# EAGLE board OBCv1_18_2_12 (EAGLE 5.10)
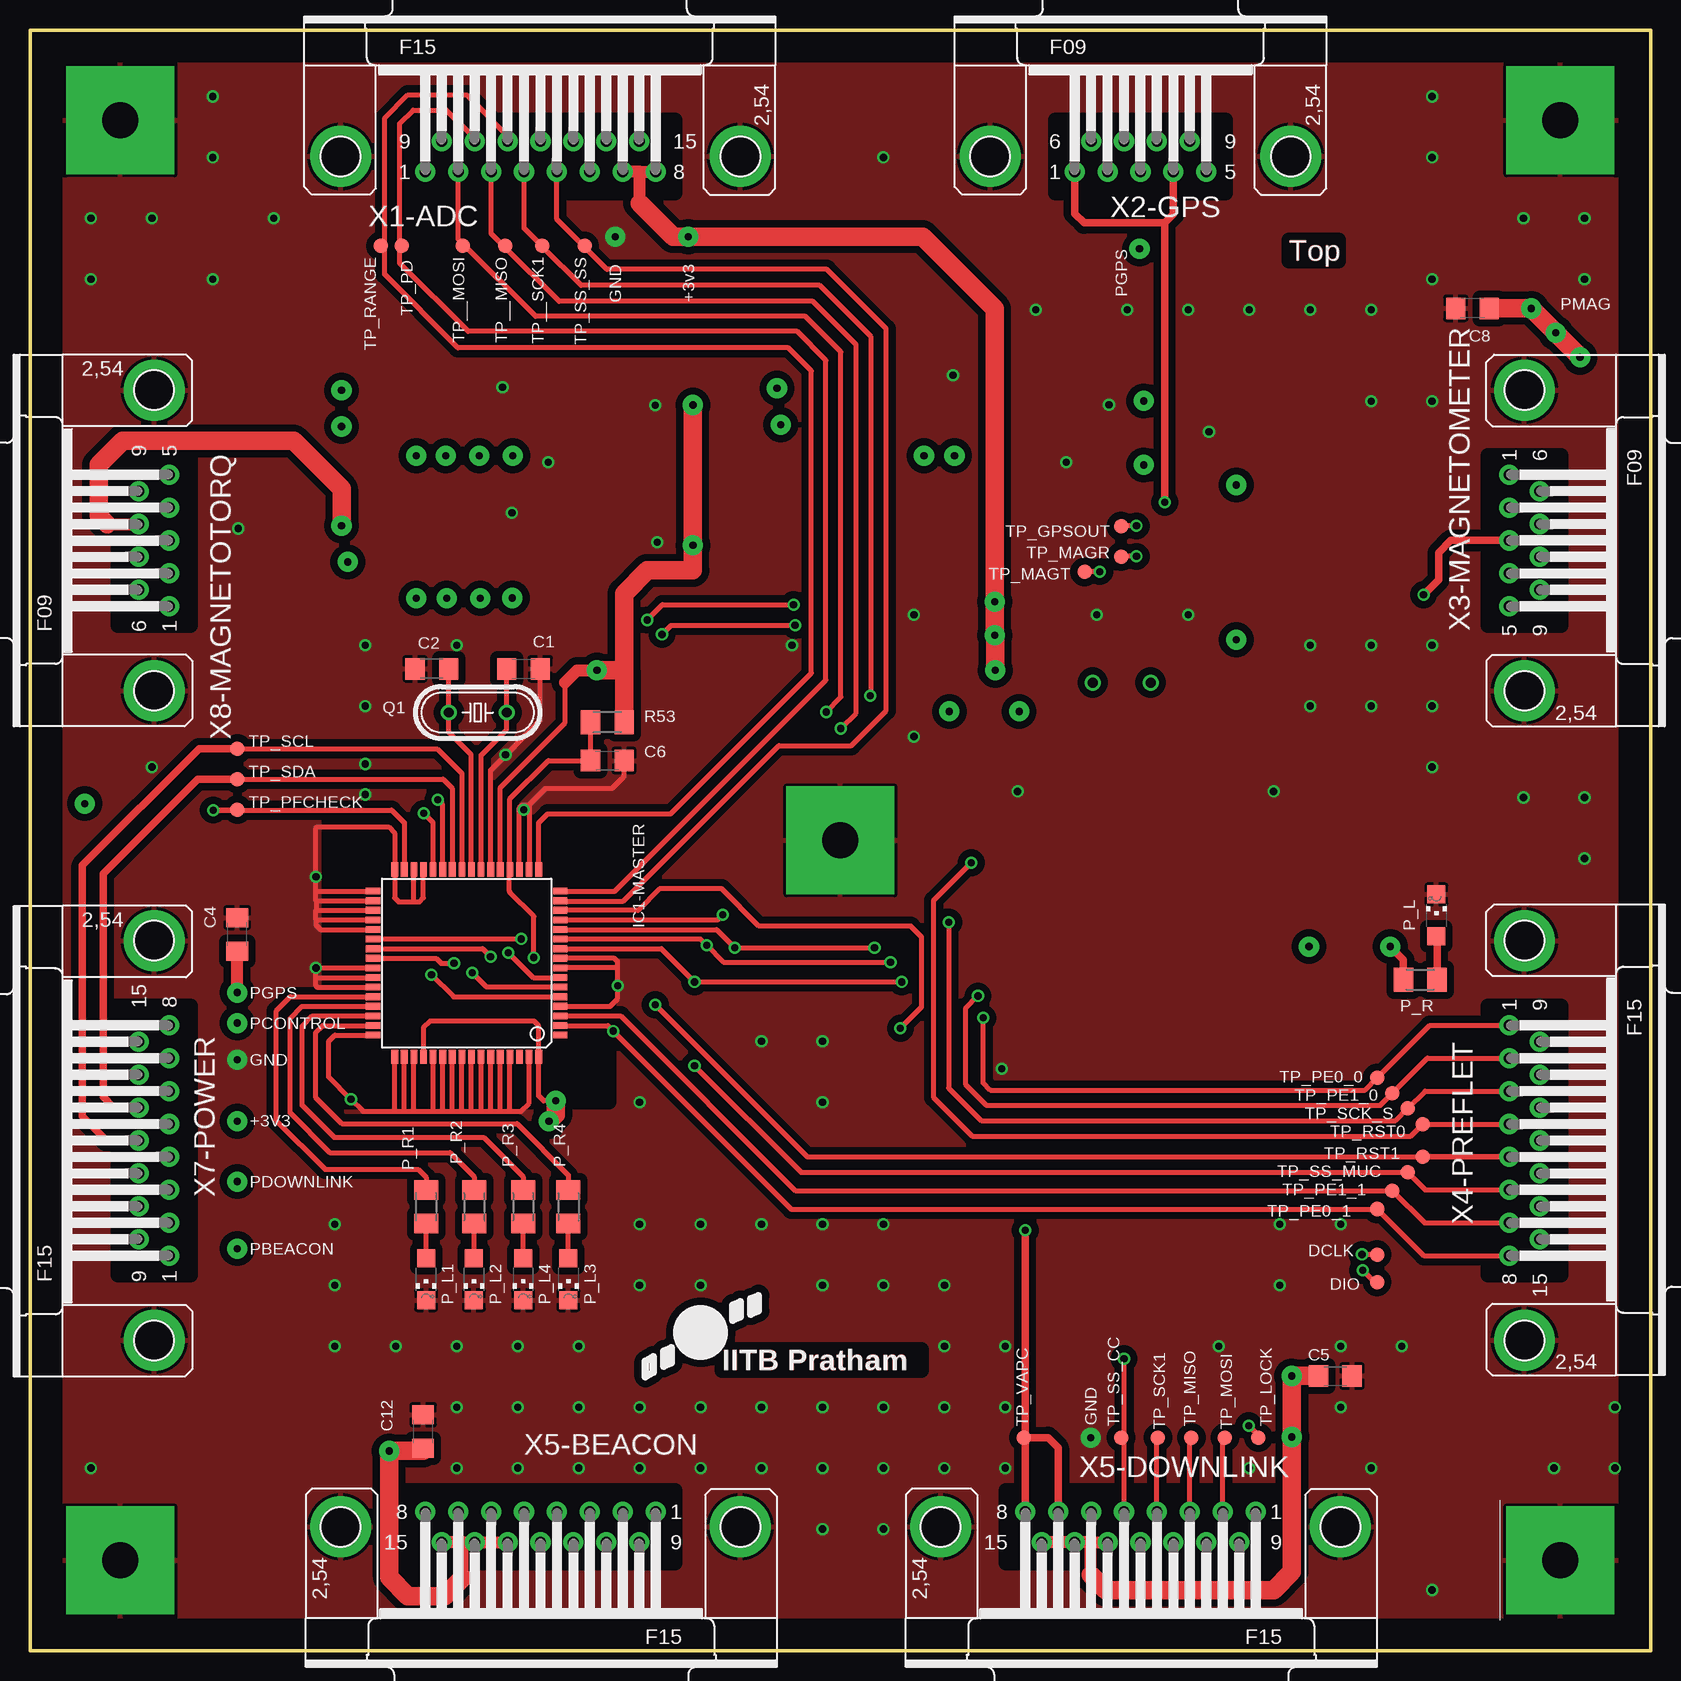
[diagram p0: board, top side]
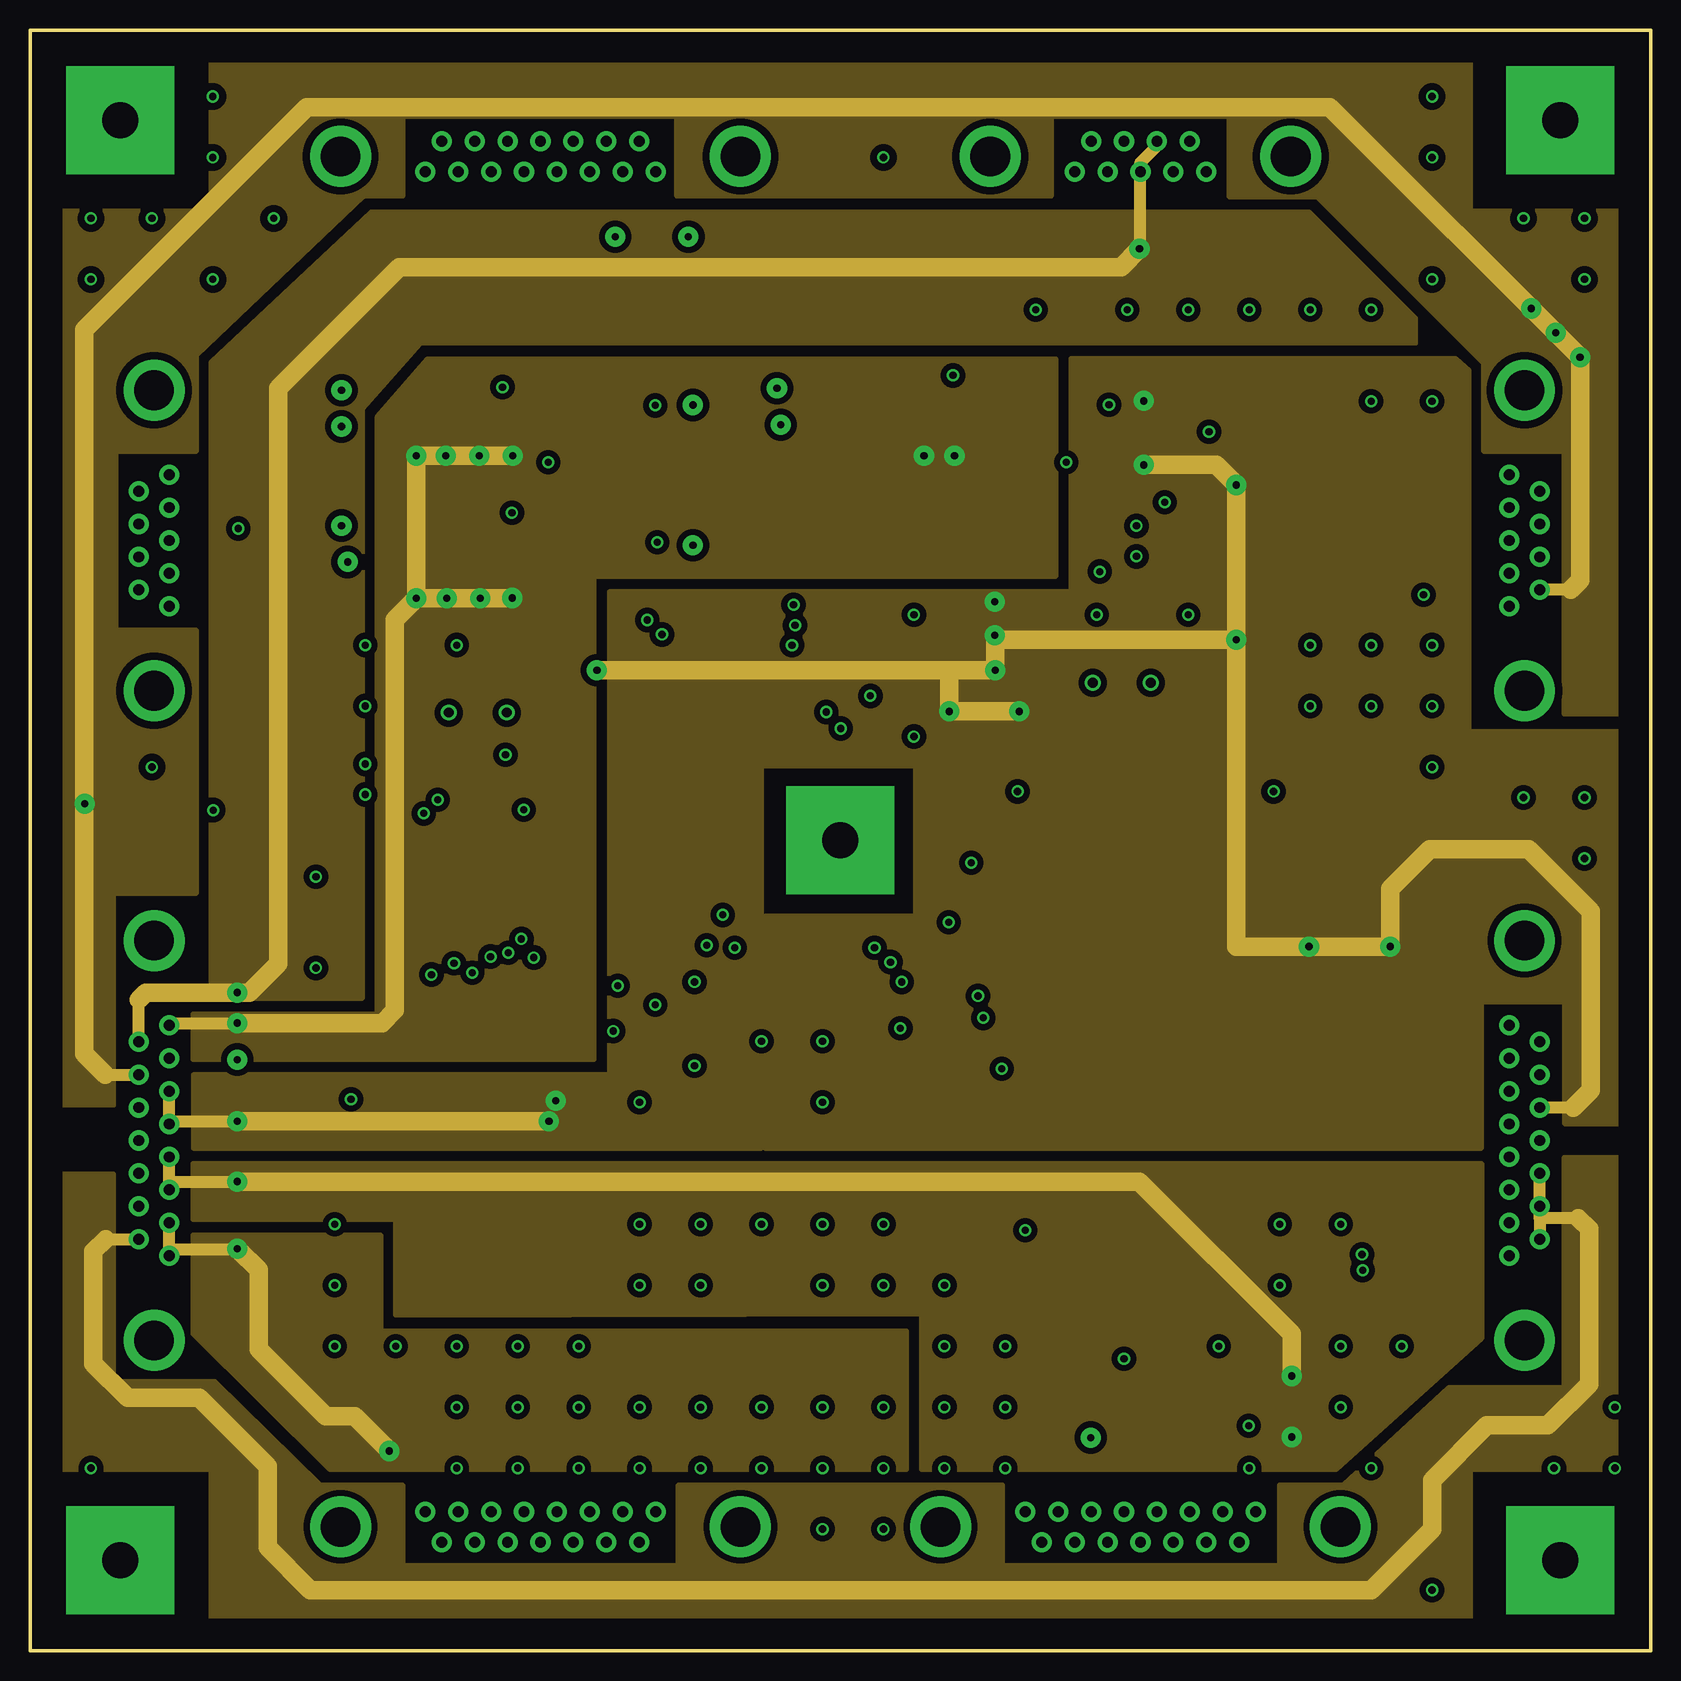
[diagram p1: board, inner layer Power]
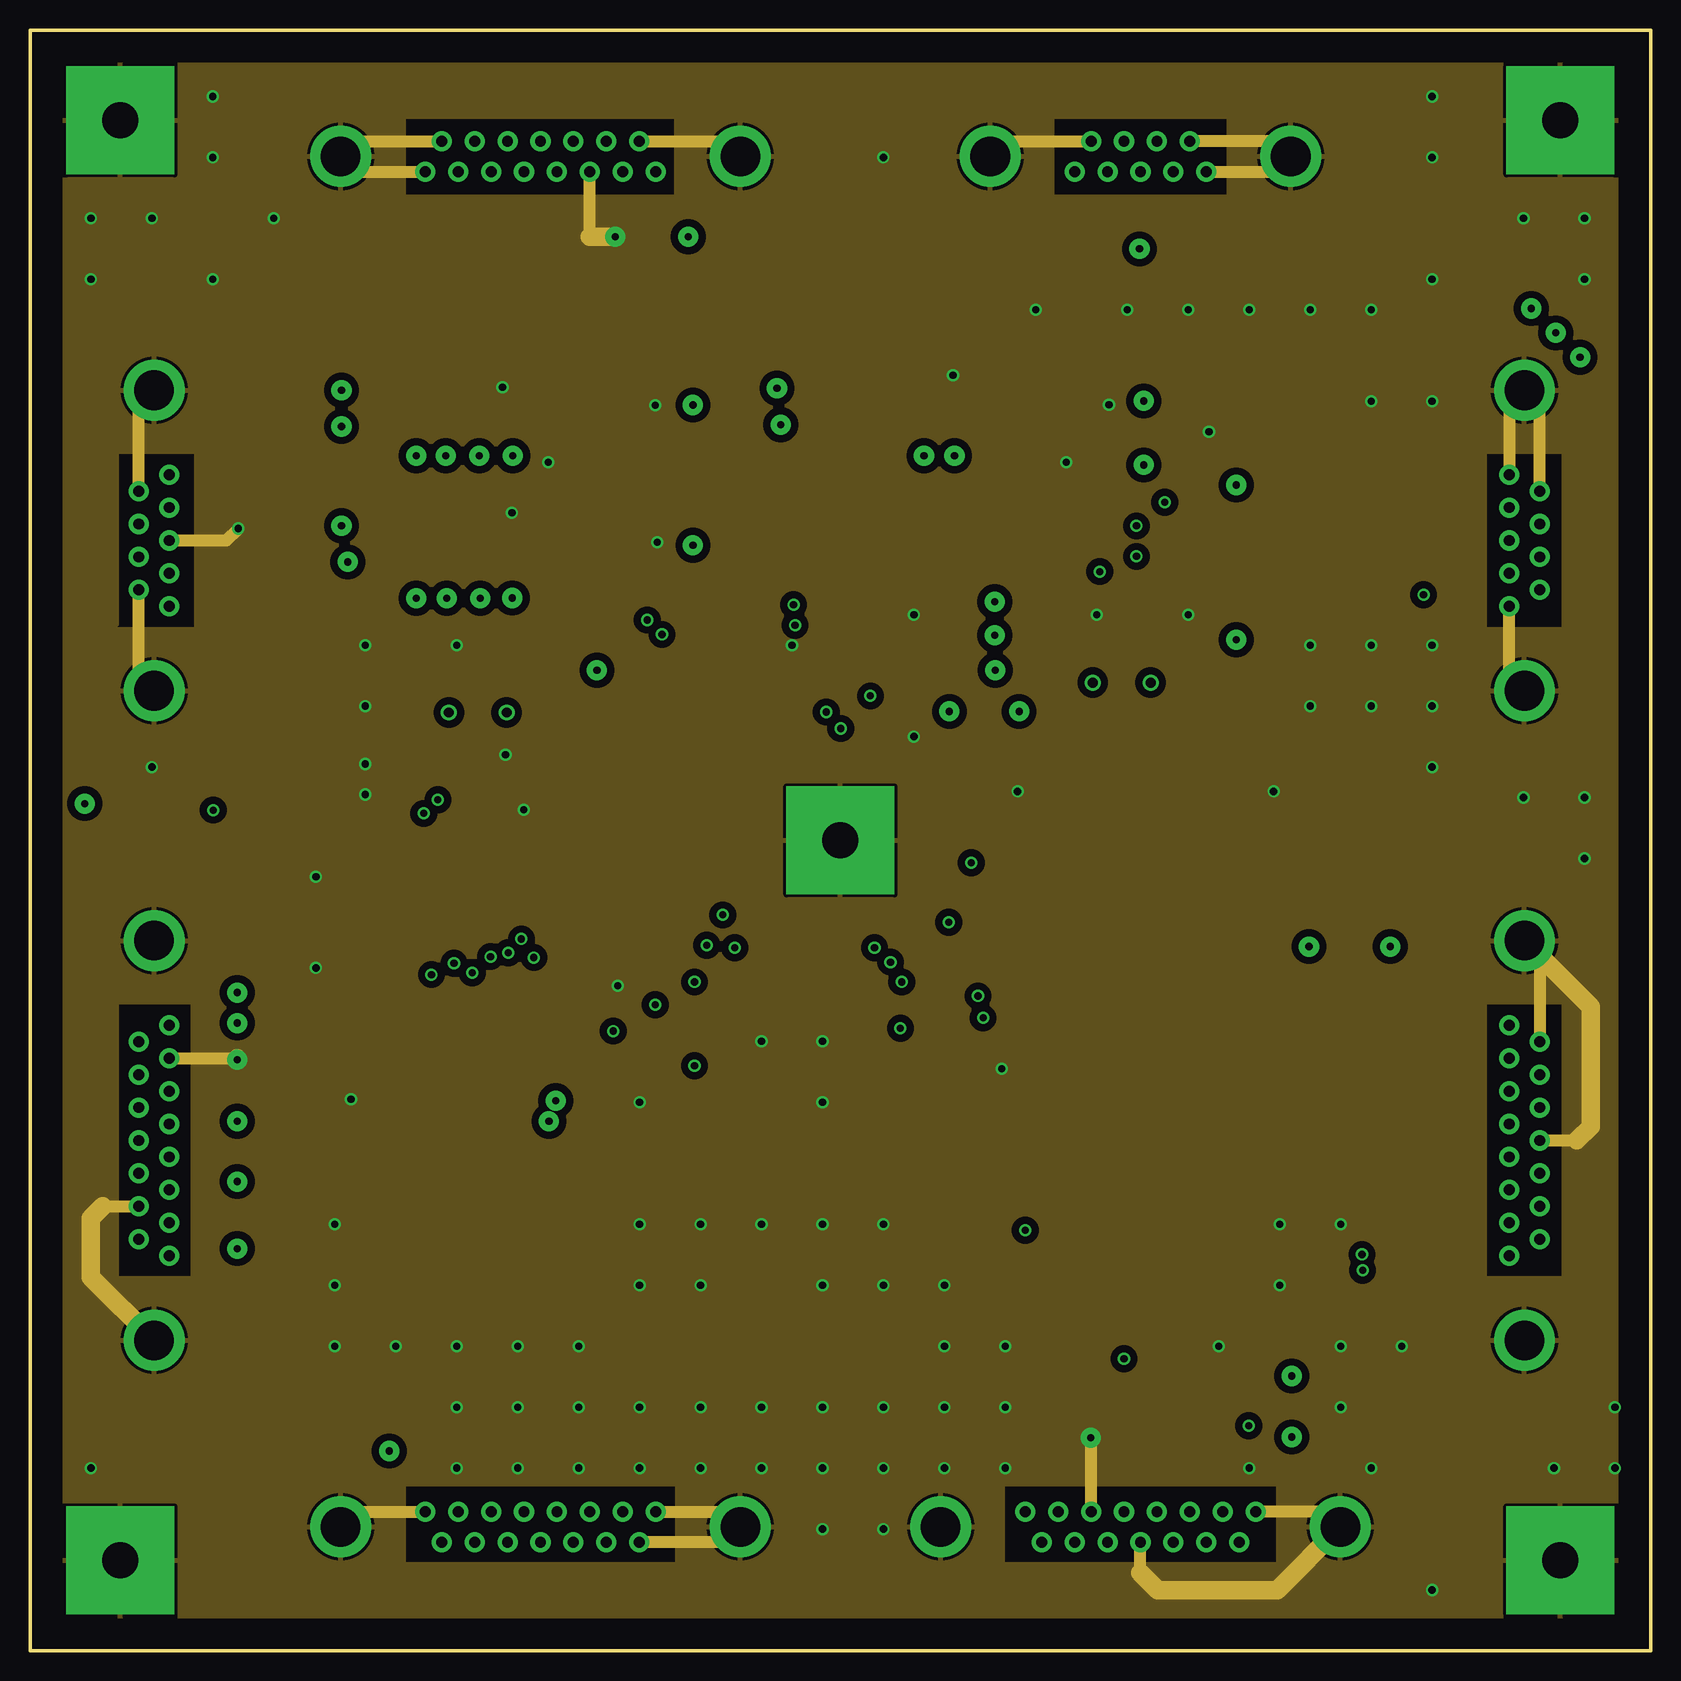
[diagram p2: board, inner layer Gnd]
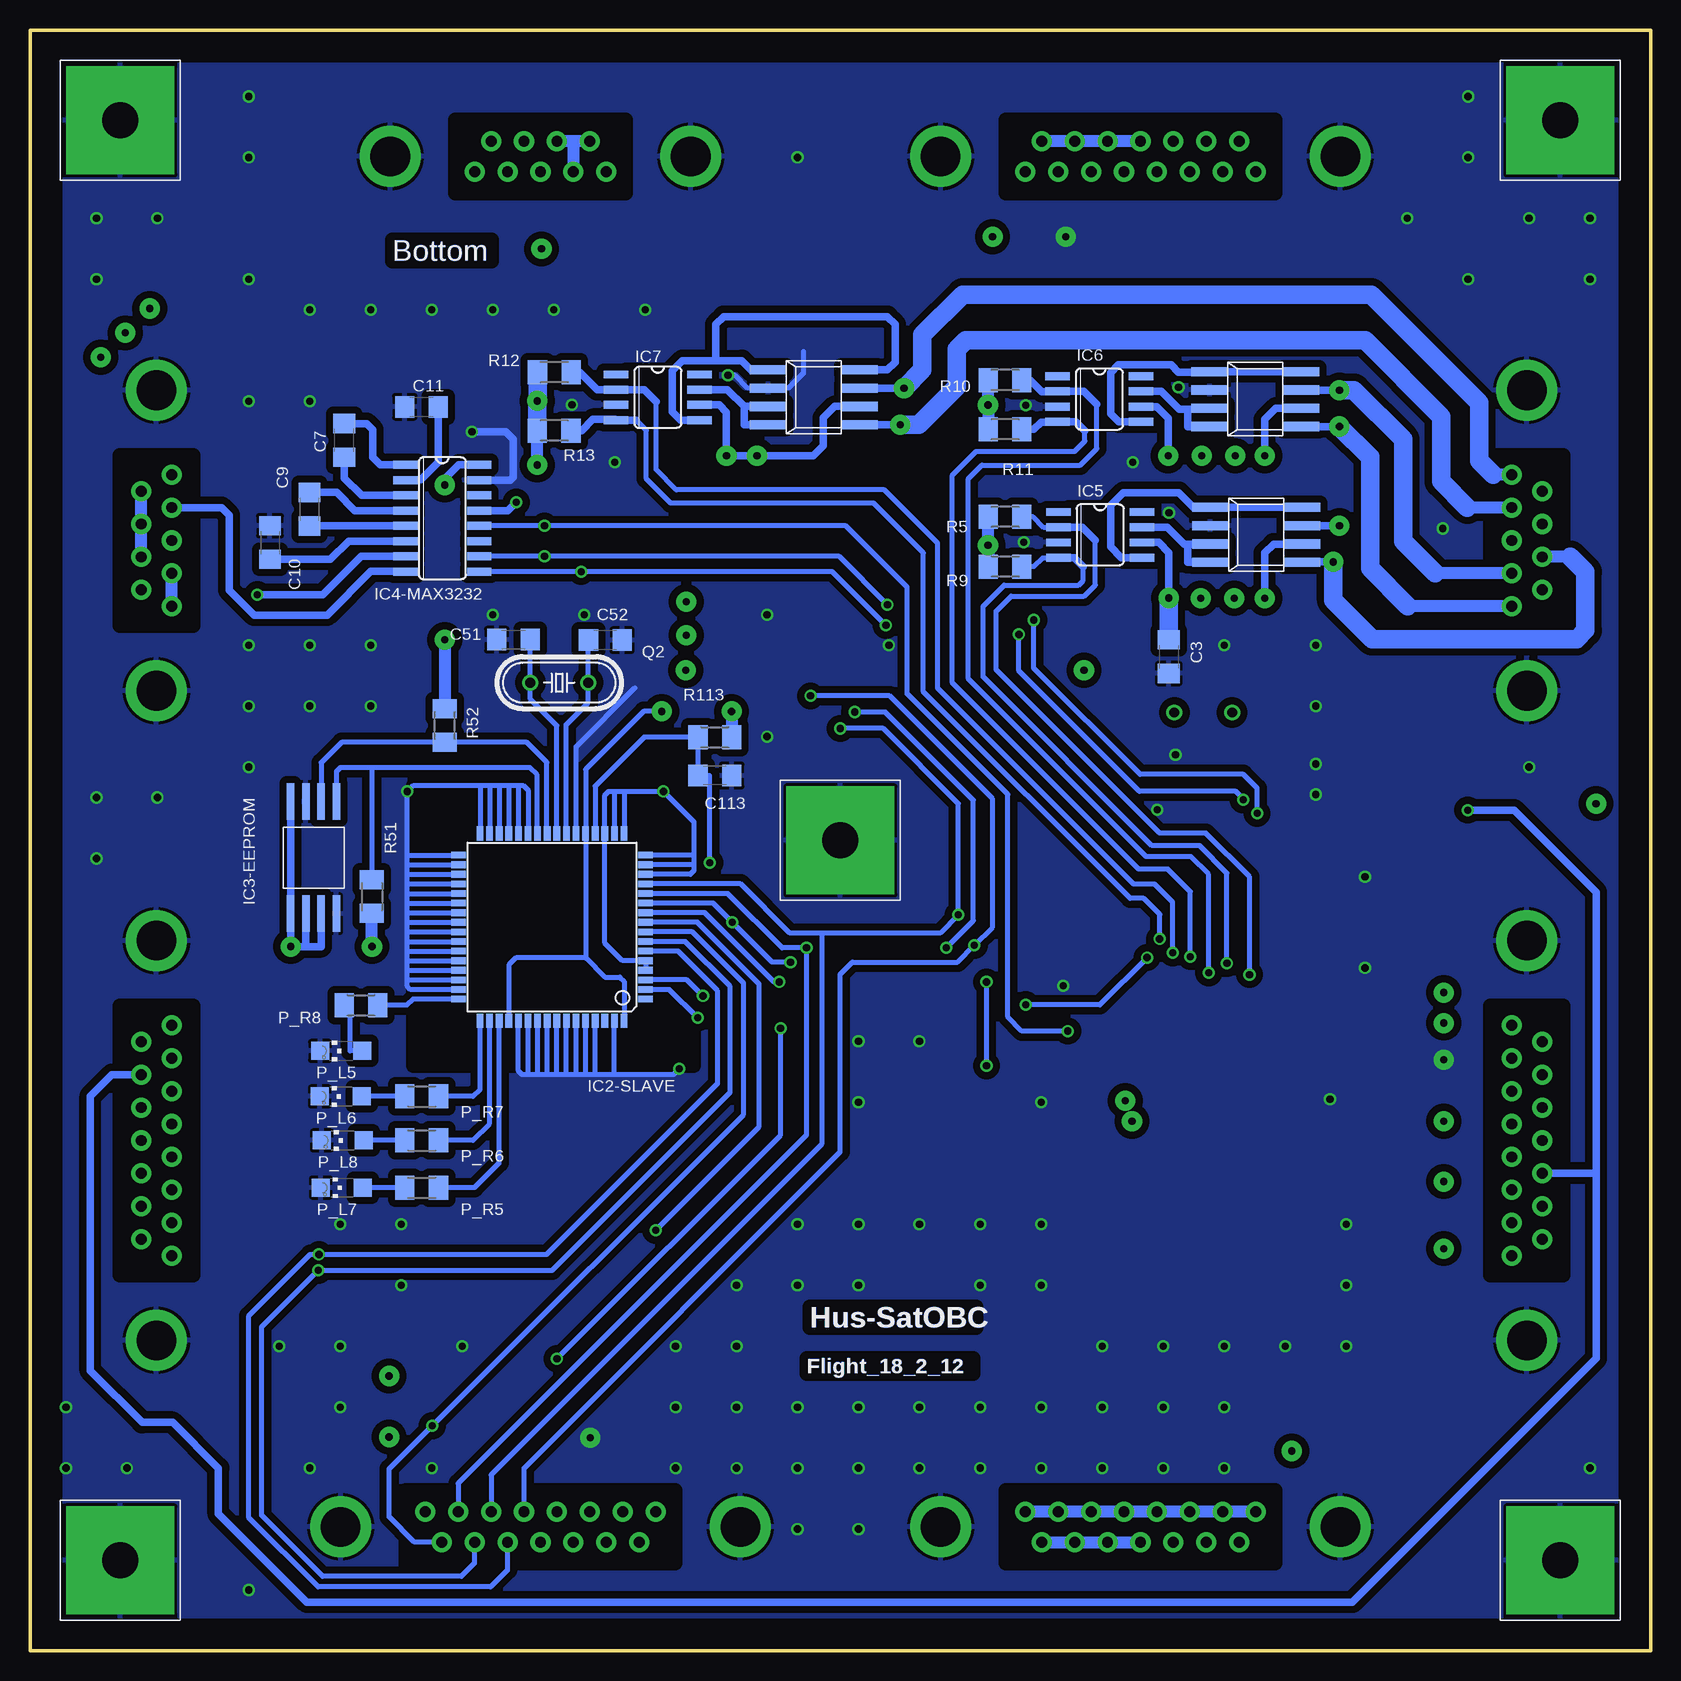
[diagram p3: board, bottom side, seen from below]

Size 135.08 x 135.08 mm. Coordinates in mm from the lower left corner, seen from the top.
Outline: 0,135.08 0,0 135.08,0 135.08,135.08 0,135.08
Copper layers (1*16): Top 0.07mm / dielectric 1.5mm / Bottom 0.07mm
Design rules "satellite": minimum track width 10mil, minimum drill 20mil, track to track 6mil, track to pad 6mil, pad to pad 6mil, via to via 6mil, smd to smd 6mil, copper to edge 100mil, drill to drill 8mil, minimum pad ring 10mil, minimum via ring 8mil, stop-mask expansion 4mil, vias tented up to drill 0mil, thermal gap 10mil
Net classes: 0 Signal: width 0.254 mm, clearance 0.254 mm; 1 Power: width 0.254 mm, clearance 0.508 mm to class 0, clearance 0.508 mm
tRestrict: area 24.9,45.7 to 48.3,69.1
bRestrict: area 79.8,48.8 to 103.1,72.1

## Footprints (pad centres in the part's own frame; a part is rotated, then mirrored left to right if it is on the bottom)
C1206 = smd 1.6 x 1.8: 1 -1.4,0; 2 1.4,0
TP12R = smd 1.2 x 1.2: TP 0,0
TQFP64 = smd 1.194 x 0.559: 1 -7.8,6; 2 -7.8,5.2; 3 -7.8,4.4; 4 -7.8,3.6; 5 -7.8,2.8; 6 -7.8,2; 7 -7.8,1.2; 8 -7.8,0.4; 9 -7.8,-0.4; 10 -7.8,-1.2; 11 -7.8,-2; 12 -7.8,-2.8; 13 -7.8,-3.6; 14 -7.8,-4.4; 15 -7.8,-5.2; 16 -7.8,-6; 33 7.8,-6; 34 7.8,-5.2; 35 7.8,-4.4; 36 7.8,-3.6; 37 7.8,-2.8; 38 7.8,-2; 39 7.8,-1.2; 40 7.8,-0.4; 41 7.8,0.4; 42 7.8,1.2; 43 7.8,2; 44 7.8,2.8; 45 7.8,3.6; 46 7.8,4.4; 47 7.8,5.2; 48 7.8,6 | smd 0.559 x 1.194: 17 -6,-7.8; 18 -5.2,-7.8; 19 -4.4,-7.8; 20 -3.6,-7.8; 21 -2.8,-7.8; 22 -2,-7.8; 23 -1.2,-7.8; 24 -0.4,-7.8; 25 0.4,-7.8; 26 1.2,-7.8; 27 2,-7.8; 28 2.8,-7.8; 29 3.6,-7.8; 30 4.4,-7.8; 31 5.2,-7.8; 32 6,-7.8; 49 6,7.8; 50 5.2,7.8; 51 4.4,7.8; 52 3.6,7.8; 53 2.8,7.8; 54 2,7.8; 55 1.2,7.8; 56 0.4,7.8; 57 -0.4,7.8; 58 -1.2,7.8; 59 -2,7.8; 60 -2.8,7.8; 61 -3.6,7.8; 62 -4.4,7.8; 63 -5.2,7.8; 64 -6,7.8
24FC1025 = smd 0.635 x 3.048: P$1 1.905,4.674; P$2 0.635,4.674; P$3 -0.635,4.674; P$4 -1.905,4.674; P$5 -1.905,-4.674; P$6 -0.635,-4.674; P$7 0.635,-4.674; P$8 1.905,-4.674
SO16 = smd 0.66 x 2.032: 1 -4.445,-3.073; 2 -3.175,-3.073; 3 -1.905,-3.073; 4 -0.635,-3.073; 5 0.635,-3.073; 6 1.905,-3.073; 7 3.175,-3.073; 8 4.445,-3.073; 9 4.445,3.073; 10 3.175,3.073; 11 1.905,3.073; 12 0.635,3.073; 13 -0.635,3.073; 14 -1.905,3.073; 15 -3.175,3.073; 16 -4.445,3.073
SO08 = smd 0.66 x 2.032: 1 -1.905,-3.48; 2 -0.635,-3.48; 3 0.635,-3.48; 4 1.905,-3.48; 5 1.905,3.48; 6 0.635,3.48; 7 -0.635,3.48; 8 -1.905,3.48
SM8 = smd 0.762 x 3.048: 1 2.286,3.81; 2 0.762,3.81; 3 -0.762,3.81; 4 -2.286,3.81; 5 -2.286,-3.81; 6 -0.762,-3.81; 7 0.762,-3.81; 8 2.286,-3.81
CHIPLED_1206 = smd 1.5 x 1.5: A 0,-1.75; C 0,1.75
M1206 = smd 1.6 x 2: 1 -1.4,0; 2 1.4,0
HC49/S = drill 0.813 round: 1 -2.413,0; 2 2.413,0
MOUNT_10MM = drill 3 pad 9 square: P$1 0,0
F15HP = drill 0.9 pad 1.676 round: 1 -9.601,-1.27; 2 -6.858,-1.27; 3 -4.115,-1.27; 4 -1.372,-1.27; 5 1.372,-1.27; 6 4.115,-1.27; 7 6.858,-1.27; 8 9.601,-1.27; 9 -8.23,1.27; 10 -5.486,1.27; 11 -2.743,1.27; 12 0,1.27; 13 2.743,1.27; 14 5.486,1.27; 15 8.23,1.27 | drill 3.302 pad 5.08 round: G1 16.662,0; G2 -16.662,0
F09HP = drill 0.9 pad 1.676 round: 1 -5.486,-1.27; 2 -2.743,-1.27; 3 0,-1.27; 4 2.743,-1.27; 5 5.486,-1.27; 6 -4.115,1.27; 7 -1.372,1.27; 8 1.372,1.27; 9 4.115,1.27 | drill 3.302 pad 5.08 round: G1 -12.522,0; G2 12.522,0

## Placement (x,y rotation side)
C1  22pF  [C1206]  41.12,81.84 0 top
C2  22pF  [C1206]  33.48,81.85 180 top
C3  0.1uF  [C1206]  40.19,82.86 270 bottom
C4  0.1uF  [C1206]  17.27,59.71 90 top
C5  0.1uF  [C1206]  108.77,22.92 0 top
C6  4.7uF  [C1206]  48.11,74.2 0 top
C7  0.1uF  [C1206]  108.89,100.89 90 bottom
C8  0.1uF  [C1206]  120.21,111.89 180 top
C9  0.1uF  [C1206]  111.78,95.14 90 bottom
C10  0.1uF  [C1206]  115.08,92.36 270 bottom
C11  0.1uF  [C1206]  102.45,103.68 0 bottom
C12  0.1uF  [C1206]  32.77,18.29 90 top
C51  22p  [C1206]  94.79,84.28 0 bottom
C52  22p  [C1206]  87.14,84.23 180 bottom
C113  0.1u  [C1206]  78.01,72.95 180 bottom
DCLK  TPSQTP12R  [TP12R]  112.27,33.02 0 top
DIO  TPSQTP12R  [TP12R]  112.27,30.73 0 top
IC1-MASTER  MEGA128-A  [TQFP64]  36.39,57.32 180 top
IC2-SLAVE  MEGA128-A  [TQFP64]  91.58,60.32 180 bottom
IC3-EEPROM  24FC1025  [24FC1025]  111.45,66.11 180 bottom
IC4-MAX3232  MAX3232CSE  [SO16]  100.72,94.39 270 bottom
IC5  MAX4427SO  [SO08]  45.9,93.01 270 bottom
IC6  MAX4427SO  [SO08]  45.96,104.32 270 bottom
IC7  MAX4427SO  [SO08]  82.76,104.47 270 bottom
IC8  ZXMHC3A01T8  [SM8]  32.9,93.01 90 bottom
IC9  ZXMHC3A01T8  [SM8]  32.96,104.32 90 bottom
IC10  ZXMHC3A01T8  [SM8]  69.76,104.47 90 bottom
P_L  [CHIPLED_1206]  117.2,61.29 0 top
P_L1  [CHIPLED_1206]  33,30.98 180 top
P_L2  [CHIPLED_1206]  37,30.98 180 top
P_L3  [CHIPLED_1206]  44.87,30.98 180 top
P_L4  [CHIPLED_1206]  41.09,30.98 180 top
P_L5  [CHIPLED_1206]  109.14,50 90 bottom
P_L6  [CHIPLED_1206]  109.17,46.21 90 bottom
P_L7  [CHIPLED_1206]  109.09,38.6 90 bottom
P_L8  [CHIPLED_1206]  109.01,42.54 90 bottom
P_R  1K  [M1206]  115.86,55.94 180 top
P_R1  1K  [M1206]  33,37.02 90 top
P_R2  1K  [M1206]  37.02,37.02 90 top
P_R3  1K  [M1206]  41.09,37.02 90 top
P_R4  1K  [M1206]  44.87,37.02 90 top
P_R5  1K  [M1206]  102.44,38.6 180 bottom
P_R6  1K  [M1206]  102.44,42.54 180 bottom
P_R7  1K  [M1206]  102.44,46.21 180 bottom
P_R8  1K  [M1206]  107.5,53.81 180 bottom
Q1  8MHz  [HC49/S]  37.31,78.2 0 top
Q2  8MHz  [HC49/S]  90.98,80.69 0 bottom
R5  47k  [M1206]  53.83,94.5 0 bottom
R9  47k  [M1206]  53.83,90.36 0 bottom
R10  47k  [M1206]  53.83,105.91 0 bottom
R11  47k  [M1206]  53.83,101.79 0 bottom
R12  47k  [M1206]  91.39,106.56 0 bottom
R13  47k  [M1206]  91.4,101.7 0 bottom
R51  10K  [M1206]  106.58,62.87 90 bottom
R52  10K  [M1206]  100.51,77.12 270 bottom
R53  47K  [M1206]  48.11,77.39 0 top
R113  47K  [M1206]  78.01,76.15 180 bottom
TP__MISO  TPSQTP12R  [TP12R]  39.62,117.09 90 top
TP__MOSI  TPSQTP12R  [TP12R]  36.07,117.09 90 top
TP__SCK1  TPSQTP12R  [TP12R]  42.67,117.09 90 top
TP_GPSOUT  TPSQTP12R  [TP12R]  90.93,93.73 0 top
TP_LOCK  TPSQTP12R  [TP12R]  102.36,17.78 0 top
TP_MAGR  TPSQTP12R  [TP12R]  90.93,91.19 0 top
TP_MAGT  TPSQTP12R  [TP12R]  87.88,89.92 0 top
TP_MISO  TPSQTP12R  [TP12R]  96.77,17.78 0 top
TP_MOSI  TPSQTP12R  [TP12R]  99.57,17.78 0 top
TP_PD  TPSQTP12R  [TP12R]  30.99,117.09 0 top
TP_PE0_0  TPSQTP12R  [TP12R]  112.27,47.75 0 top
TP_PE0_1  TPSQTP12R  [TP12R]  112.27,36.83 0 top
TP_PE1_0  TPSQTP12R  [TP12R]  113.54,46.48 0 top
TP_PE1_1  TPSQTP12R  [TP12R]  113.54,38.35 0 top
TP_PFCHECK  TPSQTP12R  [TP12R]  17.27,70.1 0 top
TP_RANGE  TPSQTP12R  [TP12R]  29.21,117.09 0 top
TP_RST0  TPSQTP12R  [TP12R]  116.08,43.91 0 top
TP_RST1  TPSQTP12R  [TP12R]  116.08,41.17 0 top
TP_SCK1  TPSQTP12R  [TP12R]  93.98,17.78 0 top
TP_SCK_S  TPSQTP12R  [TP12R]  114.81,45.21 0 top
TP_SCL  TPSQTP12R  [TP12R]  17.27,75.18 0 top
TP_SDA  TPSQTP12R  [TP12R]  17.27,72.64 0 top
TP_SS_CC  TPSQTP12R  [TP12R]  90.93,17.78 0 top
TP_SS_MUC  TPSQTP12R  [TP12R]  114.81,39.88 0 top
TP_SS_SS  TPSQTP12R  [TP12R]  46.23,117.09 90 top
TP_VAPC  TPSQTP12R  [TP12R]  82.8,17.78 0 top
U$1  MOUNT_SQ  [MOUNT_10MM]  127.54,7.54 0 bottom
U$9  MOUNT_SQ  [MOUNT_10MM]  127.54,127.54 0 bottom
U$10  MOUNT_SQ  [MOUNT_10MM]  7.54,7.54 0 bottom
U$11  MOUNT_SQ  [MOUNT_10MM]  67.54,67.54 0 bottom
U$12  MOUNT_SQ  [MOUNT_10MM]  7.54,127.54 0 bottom
X1-ADC  ADC  [F15HP]  42.54,124.54 0 top
X2-GPS  GPS  [F09HP]  92.54,124.54 0 top
X3-MAGNETOMETER  Magnetometer  [F09HP]  124.54,92.54 270 top
X4-PREFLET  Preflet  [F15HP]  124.54,42.54 270 top
X5-BEACON  Beacon  [F15HP]  42.54,10.34 180 top
X5-DOWNLINK  Downlink  [F15HP]  92.54,10.34 180 top
X7-POWER  Power  [F15HP]  10.34,42.54 90 top
X8-MAGNETOTORQ  Magnetotorq  [F09HP]  10.34,92.54 90 top

## Library data of the parts
C1-C12 C51 C52 C113 R5 R9-R13 = rcl
DCLK DIO TP__MISO TP__MOSI TP__SCK1 TP_GPSOUT TP_LOCK TP_MAGR TP_MAGT TP_MISO TP_MOSI TP_PD TP_PE0_0 TP_PE0_1 TP_PE1_0 TP_PE1_1 TP_PFCHECK TP_RANGE TP_RST0 TP_RST1 TP_SCK1 TP_SCK_S TP_SCL TP_SDA TP_SS_CC TP_SS_MUC TP_SS_SS TP_VAPC = testpad
IC1-MASTER IC2-SLAVE IC3-EEPROM IC4-MAX3232 IC5-IC10 P_L P_L1-P_L8 U$1 U$9-U$12 X1-ADC X2-GPS X3-MAGNETOMETER X4-PREFLET X5-BEACON X5-DOWNLINK X7-POWER X8-MAGNETOTORQ = satellite
P_R P_R1-P_R8 R51-R53 R113 = resistor
Q1 Q2 = crystal

## Nets
+3V3 [Power]: IC1-MASTER.21 IC1-MASTER.52 IC1-MASTER.64 IC2-SLAVE.21 IC2-SLAVE.52 IC2-SLAVE.64 IC3-EEPROM.P$1 IC3-EEPROM.P$2 IC3-EEPROM.P$3 IC3-EEPROM.P$8 IC4-MAX3232.16 P_R.2 R5.1 R9.1 R10.1 R11.1 R12.1 R13.1 R51.1 R52.1 R53.2 R113.1 X1-ADC.7 X1-ADC.8 X4-PREFLET.11 X7-POWER.5 X7-POWER.6
DCLK: DCLK.TP IC2-SLAVE.6 X5-DOWNLINK.11
DIO: DIO.TP IC2-SLAVE.7 X5-DOWNLINK.10
GND [Power]: C1.2 C2.2 C3.2 C4.2 C5.2 C6.2 C8.2 C10.1 C11.1 C12.2 C51.1 C52.1 C113.1 IC1-MASTER.4 IC1-MASTER.8 IC1-MASTER.9 IC1-MASTER.18 IC1-MASTER.19 IC1-MASTER.22 IC1-MASTER.29 IC1-MASTER.30 IC1-MASTER.32 IC1-MASTER.33 IC1-MASTER.34 IC1-MASTER.35 IC1-MASTER.36 IC1-MASTER.37 IC1-MASTER.41 IC1-MASTER.42 IC1-MASTER.43 IC1-MASTER.48 IC1-MASTER.49 IC1-MASTER.50 IC1-MASTER.51 IC1-MASTER.53 IC1-MASTER.54 IC1-MASTER.55 IC1-MASTER.56 IC1-MASTER.57 IC1-MASTER.58 IC1-MASTER.59 IC1-MASTER.60 IC1-MASTER.61 IC1-MASTER.63 IC2-SLAVE.4 IC2-SLAVE.5 IC2-SLAVE.14 IC2-SLAVE.15 IC2-SLAVE.16 IC2-SLAVE.17 IC2-SLAVE.18 IC2-SLAVE.19 IC2-SLAVE.22 IC2-SLAVE.27 IC2-SLAVE.28 IC2-SLAVE.29 IC2-SLAVE.30 IC2-SLAVE.31 IC2-SLAVE.32 IC2-SLAVE.33 IC2-SLAVE.34 IC2-SLAVE.35 IC2-SLAVE.36 IC2-SLAVE.37 IC2-SLAVE.38 IC2-SLAVE.39 IC2-SLAVE.40 IC2-SLAVE.41 IC2-SLAVE.42 IC2-SLAVE.43 IC2-SLAVE.44 IC2-SLAVE.45 IC2-SLAVE.46 IC2-SLAVE.47 IC2-SLAVE.53 IC2-SLAVE.54 IC2-SLAVE.55 IC2-SLAVE.56 IC2-SLAVE.57 IC2-SLAVE.58 IC2-SLAVE.59 IC2-SLAVE.60 IC2-SLAVE.61 IC2-SLAVE.63 IC3-EEPROM.P$4 IC3-EEPROM.P$7 IC4-MAX3232.15 IC5.3 IC6.3 IC7.3 IC8.2 IC9.2 IC10.2 P_L1.C P_L2.C P_L3.C P_L4.C P_L5.C P_L6.C P_L7.C P_L8.C P_L.C U$1.P$1 U$9.P$1 U$10.P$1 U$11.P$1 U$12.P$1 X1-ADC.1 X1-ADC.6 X1-ADC.9 X1-ADC.12 X1-ADC.13 X1-ADC.14 X1-ADC.15 X1-ADC.G1 X1-ADC.G2 X2-GPS.2 X2-GPS.5 X2-GPS.6 X2-GPS.7 X2-GPS.9 X2-GPS.G1 X2-GPS.G2 X3-MAGNETOMETER.1 X3-MAGNETOMETER.4 X3-MAGNETOMETER.5 X3-MAGNETOMETER.6 X3-MAGNETOMETER.7 X3-MAGNETOMETER.8 X3-MAGNETOMETER.G1 X3-MAGNETOMETER.G2 X4-PREFLET.9 X4-PREFLET.12 X4-PREFLET.G1 X4-PREFLET.G2 X5-BEACON.1 X5-BEACON.2 X5-BEACON.3 X5-BEACON.4 X5-BEACON.5 X5-BEACON.6 X5-BEACON.7 X5-BEACON.8 X5-BEACON.9 X5-BEACON.10 X5-BEACON.11 X5-BEACON.12 X5-BEACON.G1 X5-BEACON.G2 X5-DOWNLINK.1 X5-DOWNLINK.6 X5-DOWNLINK.12 X5-DOWNLINK.G1 X5-DOWNLINK.G2 X7-POWER.7 X7-POWER.10 X7-POWER.G1 X7-POWER.G2 X8-MAGNETOTORQ.3 X8-MAGNETOTORQ.6 X8-MAGNETOTORQ.9 X8-MAGNETOTORQ.G1 X8-MAGNETOTORQ.G2
GPSOUT: IC4-MAX3232.13 X2-GPS.1 X2-GPS.4
LOCK: IC2-SLAVE.8 TP_LOCK.TP X5-DOWNLINK.9
MAG_R: IC4-MAX3232.7 X3-MAGNETOMETER.3
MAG_T: IC4-MAX3232.8 X3-MAGNETOMETER.2
MISO: IC1-MASTER.13 IC2-SLAVE.13 TP__MISO.TP TP_MISO.TP X1-ADC.3 X5-DOWNLINK.3
MOSI: IC1-MASTER.12 IC2-SLAVE.12 TP__MOSI.TP TP_MOSI.TP X1-ADC.2 X5-DOWNLINK.2
N$1: C1.1 IC1-MASTER.23 Q1.2
N$2: C2.1 IC1-MASTER.24 Q1.1
N$3: P_L.A P_R.1
N$8: P_L1.A P_R1.1
N$9: IC1-MASTER.44 P_R1.2
N$10: IC1-MASTER.45 P_R2.2
N$11: IC5.7 IC8.3 IC8.4
N$12: C52.2 IC2-SLAVE.23 Q2.2
N$13: C51.2 IC2-SLAVE.24 Q2.1
N$15: IC7.5 IC10.1 IC10.8
N$19: IC2-SLAVE.25 IC3-EEPROM.P$6 R52.2
N$20: IC2-SLAVE.26 IC3-EEPROM.P$5 R51.2
N$21: P_L2.A P_R2.1
N$22: IC1-MASTER.46 P_R3.2
N$23: P_L4.A P_R3.1
N$24: IC1-MASTER.47 P_R4.2
N$25: P_L3.A P_R4.1
N$26: P_L7.A P_R5.2
N$27: IC2-SLAVE.51 P_R5.1
N$28: IC2-SLAVE.50 P_R6.1
N$29: C7.2 IC4-MAX3232.1
N$30: C7.1 IC4-MAX3232.3
N$31: C9.2 IC4-MAX3232.4
N$32: C9.1 IC4-MAX3232.5
N$33: C11.2 IC4-MAX3232.2
N$34: C10.2 IC4-MAX3232.6
N$35: P_L8.A P_R6.2
N$36: IC2-SLAVE.49 P_R7.1
N$37: P_L6.A P_R7.2
N$38: IC2-SLAVE.48 P_R8.1
N$39: P_L5.A P_R8.2
N$44: IC8.5 X8-MAGNETOTORQ.7
N$50: IC8.7 X8-MAGNETOTORQ.8
N$51: IC5.5 IC8.1 IC8.8
N$52: IC6.7 IC9.3 IC9.4
N$56: IC9.5 X8-MAGNETOTORQ.1
N$57: IC9.7 X8-MAGNETOTORQ.2
N$61: IC6.5 IC9.1 IC9.8
N$62: IC7.7 IC10.3 IC10.4
N$66: IC10.5 X8-MAGNETOTORQ.4
N$67: IC10.7 X8-MAGNETOTORQ.5
OC3A_0: IC1-MASTER.5 IC5.2 R5.2
OC3B_0: IC1-MASTER.6 IC6.2 R10.2
OC3C_0: IC1-MASTER.7 IC7.2 R12.2
PBEACON [Power]: C12.1 X5-BEACON.13 X5-BEACON.14 X5-BEACON.15 X7-POWER.1 X7-POWER.2
PC3: IC1-MASTER.40 IC5.4 R9.2
PC4: IC1-MASTER.39 IC6.4 R11.2
PC5: IC1-MASTER.38 IC7.4 R13.2
PCHARGE [Power]: X4-PREFLET.13 X4-PREFLET.14 X4-PREFLET.15 X7-POWER.9
PCONTROL/TORQ [Power]: C3.1 IC5.6 IC6.6 IC7.6 IC8.6 IC9.6 IC10.6 X7-POWER.8
PD: IC1-MASTER.16 TP_PD.TP X1-ADC.10
PDOWNLINK [Power]: C5.1 X5-DOWNLINK.13 X5-DOWNLINK.14 X5-DOWNLINK.15 X7-POWER.3 X7-POWER.4
PE0_0: IC2-SLAVE.2 TP_PE0_0.TP X4-PREFLET.1
PE0_1: IC1-MASTER.2 IC4-MAX3232.12 TP_GPSOUT.TP TP_PE0_1.TP X4-PREFLET.8
PE1_0: IC2-SLAVE.3 TP_PE1_0.TP X4-PREFLET.2
PE1_1: IC1-MASTER.3 TP_PE1_1.TP X4-PREFLET.7
PFCHECK: IC1-MASTER.31 TP_PFCHECK.TP X4-PREFLET.10 X7-POWER.11
PGPS [Power]: C4.1 X2-GPS.3 X2-GPS.8 X7-POWER.15
PMAG [Power]: C8.1 X3-MAGNETOMETER.9 X7-POWER.14
RANGE: IC1-MASTER.17 TP_RANGE.TP X1-ADC.11
RST0: C113.2 IC2-SLAVE.20 R113.2 TP_RST0.TP X4-PREFLET.4
RST1: C6.1 IC1-MASTER.20 R53.1 TP_RST1.TP X4-PREFLET.5
RX1_0: IC1-MASTER.27 IC4-MAX3232.9 TP_MAGT.TP
SCK1: IC1-MASTER.11 IC2-SLAVE.11 TP__SCK1.TP TP_SCK1.TP TP_SCK_S.TP X1-ADC.4 X4-PREFLET.3 X5-DOWNLINK.4
SCL: IC1-MASTER.25 TP_SCL.TP X7-POWER.12
SDA: IC1-MASTER.26 TP_SDA.TP X7-POWER.13
SS_CC: IC1-MASTER.14 TP_SS_CC.TP X5-DOWNLINK.5
SS_MUC: IC1-MASTER.10 IC2-SLAVE.10 TP_SS_MUC.TP X4-PREFLET.6
SS_SS: IC1-MASTER.15 TP_SS_SS.TP X1-ADC.5
TX1_0: IC1-MASTER.28 IC4-MAX3232.10 TP_MAGR.TP
VAPC: IC2-SLAVE.9 TP_VAPC.TP X5-DOWNLINK.7 X5-DOWNLINK.8

## Tracks (layer width: path | path; a pad name or v marks a point on that pad's centre or on a via)
+3V3  (via drill 0.6 pad 1.68)
  Top 0.406: IC1-MASTER.21 39.19,71.95 44.59,77.35 44.59,80.72 | IC1-MASTER.52 32.79,51.95 33.34,52.5 42.01,52.5 42.39,52.12 IC1-MASTER.64 42.39,46.25 42.8,45.85 v43.81,45.85
  Top 0.61: P_R.2 114.46,57.6 v113.36,58.7
  Top 1.016: 50.8,120.65 50.8,123.27 | 50.8,123.27 X1-ADC.8 | 50.8,123.27 X1-ADC.7 | v47.24,81.72 45.59,81.72 44.59,80.72
  Top 1.524: v43.24,44.13 43.81,44.7 v43.81,45.85 | v80.44,81.72 80.44,84.6 v80.39,84.65 v80.39,87.44 80.39,111.85 74.38,117.86 v54.86,117.86 53.59,117.86 50.8,120.65 | 49.53,77.4 R53.2 49.51,81.72 | v47.24,81.72 49.51,81.72 | 49.51,81.72 49.51,88.12 51.44,90.04 55.24,90.04 v55.24,92.14 v55.24,103.83
  Power 1.016: 128.59,45.28 X4-PREFLET.11 | v17.27,44.13 11.61,44.13 X7-POWER.5 X7-POWER.6
  Power 1.524: v92.8,98.84 98.84,98.84 v100.51,97.17 v100.51,84.28 | 76.62,81.72 v76.62,78.3 v82.43,78.3 | 76.62,81.72 v80.44,81.72 80.44,84.28 v100.51,84.28 | 128.59,45.28 130.05,46.74 130.05,61.66 124.91,66.8 116.66,66.8 113.36,63.5 v113.36,58.7 v106.58,58.7 100.51,58.7 v100.51,84.28 | v17.27,44.13 v43.24,44.13 | v47.24,81.72 76.62,81.72
  Bottom 0.406: IC2-SLAVE.64 85.58,55.81 85.93,56.16 87.18,56.16 88.78,57.76 | IC2-SLAVE.52 95.18,57.17 94.6,57.76 88.78,57.76 | 88.78,57.76 IC2-SLAVE.21 88.78,73.47 83.95,78.3 v82.43,78.3
  Bottom 0.61: IC4-MAX3232.16 99.35,98.84 100.51,97.67 v100.51,97.17 | IC3-EEPROM.P$3 110.82,58.7 112.09,58.7 | 112.09,58.7 IC3-EEPROM.P$2 | 112.09,58.7 v113.36,58.7 IC3-EEPROM.P$1 IC3-EEPROM.P$8
  Bottom 1.016: v100.51,84.28 R52.1 | v92.8,98.84 R13.1 | R113.1 v76.62,78.3 | R51.1 v106.58,58.7 | R10.1 55.24,105.91 v55.24,103.83 55.24,101.8 R11.1 | R9.1 55.24,90.36 v55.24,92.14 55.24,94.5 R5.1
  Bottom 1.524: R13.1 v92.8,104.17 92.79,104.17 R12.1
  pour Power (isolate 0.305): 13.59,41.91 60.96,41.91 60.96,73.79 73.79,73.79 73.79,61.21 61.21,61.21 61.21,41.91 120.97,41.91 120.97,54.1 127.86,54.1 127.86,43.94 132.54,43.94 132.54,76.58 119.95,76.58 119.95,106.68 118.81,107.7 86.74,107.7 86.74,88.27 48.26,88.27 48.26,48.01 13.59,48.01
DCLK  (via drill 0.6)
  Top 0.406: v111,33.05 112.24,33.05 DCLK.TP
  Bottom 0.406: IC2-SLAVE.6 81.08,58.32 77.78,55.02 77.78,47.3 92.03,33.05 v111,33.05 111.73,33.05 116.84,27.94 116.84,11.1 111.08,5.33 96.7,5.33 95.28,6.75 X5-DOWNLINK.11
DIO  (via drill 0.6)
  Top 0.406: DIO.TP 112.04,30.73 v111.05,31.72
  Bottom 0.406: IC2-SLAVE.7 83.76,59.11 80.47,59.11 76.74,55.37 76.74,46.56 91.57,31.72 v111.05,31.72 115.78,27 115.78,11.3 110.7,6.22 99.14,6.22 98.03,7.34 X5-DOWNLINK.10
GND  (via drill 0.6, 0.6 pad 1.68)
  Top 0.406: C1.2 42.52,77.54 38.39,73.41 IC1-MASTER.22 | IC1-MASTER.4 48.34,53.72 48.97,54.35 v48.97,55.44 48.97,56.92 | 32,62.43 30.71,62.43 30.39,62.75 IC1-MASTER.32 30.39,68.16 29.88,68.68 23.95,68.68 23.83,68.55 v23.83,64.52 23.83,63.32 | 32,62.43 32.47,62.43 32.79,62.75 IC1-MASTER.29 | C6.2 49.51,72.88 48.51,71.88 42.97,71.88 41.59,70.51 | IC1-MASTER.49 30.39,44.96 | 23.83,60.92 IC1-MASTER.36 | 23.83,60.92 23.83,61.72 | IC1-MASTER.37 24.21,60.12 23.83,60.5 23.83,60.92 | IC1-MASTER.41 v23.83,56.92 23.83,56.12 | 23.83,56.12 IC1-MASTER.42 | IC1-MASTER.43 23.93,55.32 23.83,55.42 23.83,56.12 | 31.19,44.96 IC1-MASTER.50 | 30.39,44.96 31.19,44.96 | 31.99,44.96 IC1-MASTER.51 | 31.19,44.96 31.99,44.96 | 33.59,44.96 IC1-MASTER.53 | 31.99,44.96 33.59,44.96 | 34.39,44.96 IC1-MASTER.54 | 33.59,44.96 34.39,44.96 | 35.19,44.96 IC1-MASTER.55 | 34.39,44.96 35.19,44.96 | 35.99,44.96 IC1-MASTER.56 | 35.19,44.96 35.99,44.96 | 36.79,44.96 IC1-MASTER.57 | 35.99,44.96 36.79,44.96 | 37.59,44.96 IC1-MASTER.58 | 36.79,44.96 37.59,44.96 | 38.39,44.96 IC1-MASTER.59 | 37.59,44.96 38.39,44.96 | 39.19,44.96 IC1-MASTER.60 | 38.39,44.96 39.19,44.96 | 39.99,44.96 IC1-MASTER.61 | 39.19,44.96 39.99,44.96 | IC1-MASTER.63 41.59,45.65 40.89,44.96 39.99,44.96 | IC1-MASTER.48 25.41,51.32 24.89,50.8 24.89,47.83 v26.75,45.97 27.77,44.96 30.39,44.96 | 48.97,56.92 IC1-MASTER.8 | IC1-MASTER.9 48.71,57.72 48.97,57.45 48.97,56.92 | 23.83,63.32 IC1-MASTER.33 | 23.88,62.52 23.83,62.52 23.83,63.32 | 23.88,62.52 IC1-MASTER.34 | IC1-MASTER.35 23.88,61.72 23.88,62.52 | 41.59,70.51 IC1-MASTER.18 | 41.59,70.51 41.04,70.51 40.79,70.25 IC1-MASTER.19 | IC1-MASTER.30 31.99,62.45 32,62.43
  Gnd 1.016: X8-MAGNETOTORQ.3 16.36,92.54 v17.35,93.54 | 107.93,11.61 X5-DOWNLINK.1 | X7-POWER.7 17.27,49.4 | 125.81,57.93 X4-PREFLET.9 | X4-PREFLET.12 128.9,42.54 | 57.93,9.07 X5-BEACON.9 | X5-BEACON.1 57.93,11.61 | 6.07,37.05 X7-POWER.10 | X3-MAGNETOMETER.6 125.81,103.79 | 123.27,103.79 X3-MAGNETOMETER.1 | 27.15,123.27 X1-ADC.1 | 27.15,125.81 X1-ADC.9 | X5-DOWNLINK.6 88.43,17.78 v88.39,17.78 | X2-GPS.5 103.79,123.27 | 103.79,125.81 X2-GPS.9 | 46.66,117.86 X1-ADC.6 | X8-MAGNETOTORQ.6 9.07,81.29 X8-MAGNETOTORQ.G1 | X8-MAGNETOTORQ.9 9.07,103.79 | 27.15,11.61 X5-BEACON.8 | 92.54,6.52 X5-DOWNLINK.12 | 81.29,125.81 X2-GPS.6 | X1-ADC.15 57.93,125.81 | 123.27,81.29 X3-MAGNETOMETER.5
  Gnd 1.524: 107.93,11.61 X5-DOWNLINK.G2 103.94,5.08 93.98,5.08 92.54,6.52 | 17.27,49.4 v17.27,49.28 | X4-PREFLET.G2 125.81,57.93 130.05,53.69 130.05,43.69 128.9,42.54 | 57.93,9.07 X5-BEACON.G2 57.93,11.61 | 6.07,37.05 5.08,36.07 5.08,31.14 X7-POWER.G2 | 125.81,103.79 X3-MAGNETOMETER.G1 123.27,103.79 | 27.15,123.27 X1-ADC.G2 27.15,125.81 | 103.79,123.27 X2-GPS.G2 103.79,125.81 | 46.66,117.86 v48.77,117.86 | 9.07,103.79 X8-MAGNETOTORQ.G2 | X5-BEACON.G1 27.15,11.61 | X2-GPS.G1 81.29,125.81 | 57.93,125.81 X1-ADC.G1 | X3-MAGNETOMETER.G2 123.27,81.29
  Bottom 0.406: IC2-SLAVE.53 94.38,48.34 94.06,48.02 93.58,48.02 | 86.38,48.02 IC2-SLAVE.63 | 70.61,108.27 70.61,106.5 71.88,105.23 IC10.2 75.26,105.23 76.33,106.3 v76.91,106.3 | IC2-SLAVE.22 89.58,75.37 84.68,80.26 | IC2-SLAVE.4 IC2-SLAVE.5 85.72,57.52 87.18,58.98 IC2-SLAVE.19 87.18,71.32 86.87,71.63 86.38,71.63 | 87.98,48.02 IC2-SLAVE.61 | 86.38,48.02 87.98,48.02 | 88.78,48.02 IC2-SLAVE.60 | 87.98,48.02 88.78,48.02 | 89.58,48.02 IC2-SLAVE.59 | 88.78,48.02 89.58,48.02 | 90.38,48.02 IC2-SLAVE.58 | 89.58,48.02 90.38,48.02 | 91.18,48.02 IC2-SLAVE.57 | 90.38,48.02 91.18,48.02 | 91.98,48.02 IC2-SLAVE.56 | 91.18,48.02 91.98,48.02 | 92.78,48.02 IC2-SLAVE.55 | 91.98,48.02 92.78,48.02 | 93.58,48.02 IC2-SLAVE.54 | 92.78,48.02 93.58,48.02 | 86.38,48.02 81.47,48.02 v80.98,48.51 | 85.58,71.63 IC2-SLAVE.17 | 85.58,71.63 v82.3,71.63 79.76,69.09 79.76,66.32 | 86.38,71.63 IC2-SLAVE.18 | 86.38,71.63 85.58,71.63 | 79.76,66.32 IC2-SLAVE.16 | 79.76,65.52 IC2-SLAVE.15 | 79.76,66.32 79.76,65.52 | IC2-SLAVE.14 80.06,64.72 79.76,65.02 79.76,65.52 | 97.58,72.14 IC2-SLAVE.32 | 97.58,72.14 103.12,72.14 v103.63,71.63 103.63,66.32 | 103.63,66.32 IC2-SLAVE.33 | 103.63,65.52 IC2-SLAVE.34 | 103.63,65.52 103.63,66.32 | 103.63,64.72 IC2-SLAVE.35 | 103.63,64.72 103.63,65.52 | 103.63,63.92 IC2-SLAVE.36 | 103.63,63.92 103.63,64.72 | 103.63,63.12 IC2-SLAVE.37 | 103.63,63.12 103.63,63.92 | 103.63,62.32 IC2-SLAVE.38 | 103.63,62.32 103.63,63.12 | 103.63,61.52 IC2-SLAVE.39 | 103.63,61.52 103.63,62.32 | 103.63,60.72 IC2-SLAVE.40 | 103.63,60.72 103.63,61.52 | 103.63,59.92 IC2-SLAVE.41 | 103.63,59.92 103.63,60.72 | 103.63,59.12 IC2-SLAVE.42 | 103.63,59.12 103.63,59.92 | 103.63,58.32 IC2-SLAVE.43
  Bottom 0.406: 103.63,58.32 103.63,59.12 | 103.63,57.52 IC2-SLAVE.44 | 103.63,57.52 103.63,58.32 | 103.63,56.72 IC2-SLAVE.45 | 103.63,56.72 103.63,57.52 | 103.63,55.92 IC2-SLAVE.46 | 103.63,55.92 103.63,56.72 | IC2-SLAVE.47 103.38,55.12 103.63,55.37 103.63,55.92 | 96.78,72.14 IC2-SLAVE.31 | 97.58,72.14 96.78,72.14 | 95.98,72.14 IC2-SLAVE.30 | 96.78,72.14 95.98,72.14 | 95.18,72.14 IC2-SLAVE.29 | 95.98,72.14 95.18,72.14 | 94.38,72.14 IC2-SLAVE.28 | 95.18,72.14 94.38,72.14 | IC2-SLAVE.27 93.58,71.73 93.98,72.14 94.38,72.14
  Bottom 0.61: IC4-MAX3232.15 95.06,97.57 94.81,97.82 94.81,100.97 95.44,101.6 v98.25,101.6
  Bottom 1.016: X5-BEACON.12 X5-BEACON.11 X5-BEACON.10 X5-BEACON.9 | X5-BEACON.1 X5-BEACON.2 X5-BEACON.3 X5-BEACON.4 X5-BEACON.5 X5-BEACON.6 X5-BEACON.7 X5-BEACON.8 | X3-MAGNETOMETER.8 X3-MAGNETOMETER.7 X3-MAGNETOMETER.6 | 89.8,125.81 X2-GPS.2 | 89.8,125.81 X2-GPS.7 | X2-GPS.6 89.8,125.81 | X1-ADC.12 X1-ADC.13 X1-ADC.14 X1-ADC.15 | X3-MAGNETOMETER.5 X3-MAGNETOMETER.4
  other vias: 52.1,103.8 39.37,105.32 52.28,92.39 89.92,103.85 40.16,94.86 66.04,10.16 66.04,15.24 60.96,20.32 55.88,20.32 50.8,20.32 45.72,20.32 45.72,25.4 66.04,20.32 71.12,15.24 71.12,20.32 76.2,20.32 76.2,25.4 76.2,30.48 71.12,30.48 71.12,35.56 66.04,35.56 66.04,30.48 40.64,20.32 40.64,25.4 35.56,25.4 35.56,20.32 30.48,25.4 25.4,35.56 25.4,25.4 111.76,15.24 114.3,25.4 109.22,25.4 109.22,20.32 99.06,25.4 132.08,20.32 132.08,15.24 5.08,15.24 10.16,73.66 5.08,114.3 5.08,119.38 10.16,119.38 15.24,124.46 15.24,129.54 27.94,73.91 20.32,119.38 15.24,114.3 71.12,124.46 116.84,124.46 116.84,129.54 116.84,114.3 129.54,119.38 124.46,119.38 129.54,114.3 116.84,104.14 111.76,104.14 116.84,83.82 111.76,83.82 106.68,83.82 106.68,78.74 111.76,78.74 116.84,78.74 116.84,73.66 124.46,71.12 129.54,71.12 129.54,66.04 27.94,78.74 27.94,83.82 66.04,45.72 66.04,50.8 73.66,76.2 73.66,86.36 88.9,86.36 96.52,86.36 86.36,99.06 35.56,83.82 43.18,99.06 83.82,111.76 25.4,30.48 104.14,30.48 109.22,35.56 104.14,35.56 91.44,111.76 60.96,35.56 55.88,35.56 50.8,35.56 50.8,30.48 55.88,30.48 50.8,45.72 60.96,50.8 35.56,15.24 40.64,15.24 45.72,15.24 50.8,15.24 55.88,15.24 60.96,15.24 71.12,10.16 116.84,5.08 127,15.24 101.6,15.24 81.28,25.4 81.28,20.32 76.2,15.24 81.28,15.24 39.62,74.68 63.5,83.82 41.15,70.1 27.94,71.37 96.52,111.76 101.6,111.76 106.68,111.76 111.76,111.76
  pour Bottom (isolate 0.61): 132.54,132.54 2.54,132.54 2.54,2.54 132.54,2.54
  pour Top (isolate 0.61): 2.54,132.54 132.54,132.54 132.54,2.54 2.54,2.54
  pour Gnd (isolate 0.61): 2.54,132.54 31.12,132.54 31.12,121.19 53.91,121.19 53.91,127.86 31.18,127.86 31.18,132.54 85.15,132.54 85.15,121.19 99.95,121.19 99.95,127.86 85.28,127.86 85.28,132.54 132.54,132.54 132.54,99.95 121.19,99.95 121.19,85.15 127.86,85.15 127.86,99.82 132.54,99.82 132.54,54.04 121.19,54.04 121.19,31.05 127.86,31.05 127.86,53.91 132.54,53.91 132.54,2.54 104.08,2.54 104.08,13.88 81.03,13.88 81.03,7.21 103.95,7.21 103.95,2.54 53.97,2.54 53.97,13.88 31.12,13.88 31.12,7.21 53.78,7.21 53.78,2.54 2.54,2.54 2.54,31.05 13.59,31.05 13.59,54.04 7.21,54.04 7.21,31.18 2.54,31.18 2.54,85.15 13.88,85.15 13.88,99.95 7.21,99.95 7.21,85.53 2.54,85.28
GPSOUT  (via drill 0.6)
  Top 0.61: 94.57,119 87.84,119 87.05,119.78 X2-GPS.1 | 94.57,119 95.28,119.72 X2-GPS.4 | v94.57,95.73 94.57,119
  Bottom 0.61: IC4-MAX3232.13 95.27,95.03 v94.57,95.73
LOCK  (via drill 0.6)
  Top 0.406: TP_LOCK.TP 102.36,17.96 v101.56,18.76
  Bottom 0.406: IC2-SLAVE.8 79.89,59.92 75.62,55.65 75.62,44.7 101.06,19.27 v101.56,18.76 105.16,15.17 105.16,11.18 103.05,9.07 X5-DOWNLINK.9
MAG_R  (via drill 0.6)
  Top 0.61: X3-MAGNETOMETER.3 118.41,92.54 117.39,91.52 117.39,89.27 v116.13,88.01
  Bottom 0.61: IC4-MAX3232.7 107.48,91.22 110.68,88.01 v116.13,88.01
MAG_T
  Bottom 0.406: IC4-MAX3232.8 103.81,89.97
  Bottom 0.61: 103.81,89.97 106.67,89.97 110.32,86.32 116.4,86.32 118.48,88.41 118.48,94.66 119.11,95.28 X3-MAGNETOMETER.2
MISO  (via drill 0.6, 0.6 pad 0.41)
  Top 0.406: 44.3,60.9 44.3,60.92 IC1-MASTER.13 57.3,60.92 v57.72,61.34 | v67.55,76.87 68.84,78.16 68.84,108.85 65.23,112.46 44.08,112.46 39.45,117.09 | X1-ADC.3 38.42,118.12 39.41,117.13 39.45,117.09 | TP_MISO.TP 96.66,17.66 X5-DOWNLINK.3 | 39.45,117.09 TP__MISO.TP
  Bottom 0.406: 83.82,63.96 IC2-SLAVE.13 75.86,63.92 71.76,59.82 69.1,59.82 | X5-DOWNLINK.3 96.66,14.68 69.1,42.23 69.1,59.82 | v67.55,76.87 63.98,76.87 57.72,70.61 v57.72,61.34 59.25,59.82 69.1,59.82
MOSI  (via drill 0.6, 0.6 pad 0.41)
  Top 0.406: v66.35,78.25 67.58,79.48 67.58,108.26 64.62,111.21 42.13,111.21 36.07,117.28 | IC1-MASTER.12 57.21,60.12 v58.74,58.59 v70.37,58.59 | X1-ADC.2 35.68,117.66 36.03,117.31 36.07,117.28 | TP_MOSI.TP 99.4,17.61 X5-DOWNLINK.2 | 36.07,117.28 TP__MOSI.TP
  Bottom 0.406: IC2-SLAVE.12 76.93,63.12 72.41,58.59 v70.37,58.59 70.37,42.99 99.4,13.96 X5-DOWNLINK.2 | v66.35,78.25 63.81,78.25 56.47,70.91 56.47,60.86 v58.74,58.59
N$1
  Top 0.406: IC1-MASTER.23 37.59,74.65 39.72,76.78 Q1.2 C1.1
N$2
  Top 0.406: IC1-MASTER.24 36.76,65.15 36.76,74.7 34.9,76.56 Q1.1 34.9,81.85 C2.1
N$3
  Top 0.61: P_R.1 117.26,59.54 P_L.A
N$4
  Top 0.61: 58.55,28.83 59.18,29.11 59.18,27.84 58.55,27.56 58.55,28.83
N$5
  Top 0.61: 60.07,29.34 60.71,29.62 60.71,28.35 60.07,28.07 60.07,29.34
N$6
  Top 0.61: 52.81,24.99 53.44,25.27 53.44,24 52.81,23.72 52.81,24.99
N$7
  Top 0.61: 51.28,24.13 51.92,24.51 51.92,23.24 51.28,22.86 51.28,24.13
N$8
  Top 0.406: P_L1.A P_R1.1
N$9
  Top 0.406: P_R1.2 33,39.47 32.34,40.13 24.59,40.13 20.53,44.2 20.53,53.34 21.7,54.52 IC1-MASTER.44
N$10
  Top 0.406: IC1-MASTER.45 22.68,53.72 21.67,52.7 21.67,44.83 24.97,41.53 35,41.53 37.02,39.51 P_R2.2
N$11
  Bottom 0.61: 38.61,92.25 IC8.3 | 38.61,92.25 38.91,92.25 40.3,93.64 IC5.7 | IC8.4 38.61,90.72 38.61,92.25
N$12
  Bottom 0.406: C52.2 88.56,84.23 Q2.2 88.56,79.03 90.4,77.19 90.4,68.14 IC2-SLAVE.23
N$13
  Bottom 0.406: C51.2 Q2.1 93.39,79.31 91.18,77.11 IC2-SLAVE.24
N$15
  Bottom 0.406: IC7.5 79.51,102.56 79.5,102.58 | IC10.1
  Bottom 0.61: 79.51,102.56 80.86,102.56 81.55,103.25 81.55,106.69 80.71,107.54 77.91,107.54 | 77.91,107.54 75.75,107.54 74.96,106.74 IC10.1 | IC10.8 63.63,106.76 62.99,107.39 62.99,110.55 63.63,111.19 77.28,111.19 77.91,110.55 77.91,107.54
N$19
  Bottom 0.406: IC2-SLAVE.25 92,68.14 92,74.04 93.68,75.72 R52.2 109.12,75.72 110.82,74.02 IC3-EEPROM.P$6
N$20
  Bottom 0.406: IC3-EEPROM.P$5 109.55,73.28 109.22,73.61 106.58,73.61 | IC2-SLAVE.26 92.81,68.16 92.81,73 93.42,73.61 106.58,73.61 | 106.58,73.61 R51.2
N$21
  Top 0.406: P_R2.1 37.02,32.75 P_L2.A
N$22
  Top 0.406: IC1-MASTER.46 23.53,52.92 22.68,52.07 22.68,45.47 25.35,42.8 37.8,42.8 41.09,39.51 P_R3.2
N$23
  Top 0.406: P_L4.A P_R3.1
N$24
  Top 0.406: IC1-MASTER.47 24.38,52.12 23.83,51.56 23.83,46.1 25.99,43.94 40.59,43.94 44.87,39.66 P_R4.2
N$25
  Top 0.406: P_L3.A P_R4.1
N$26
  Bottom 0.406: P_R5.2 P_L7.A
N$27
  Bottom 0.406: P_R5.1 98.05,38.6 95.98,40.67 IC2-SLAVE.51
N$28
  Bottom 0.406: IC2-SLAVE.50 96.78,43.94 98.18,42.54 P_R6.1
N$29
  Bottom 0.406: IC4-MAX3232.1
  Bottom 0.61: C7.2 107.03,102.29 106.52,101.78 106.52,99.47 105.88,98.83 IC4-MAX3232.1
N$30
  Bottom 0.406: IC4-MAX3232.3 103.8,96.29 | 108.88,99.48 C7.1
  Bottom 0.61: IC4-MAX3232.3 107.44,96.3 108.88,97.74 108.88,99.48
N$31
  Bottom 0.406: IC4-MAX3232.4
  Bottom 0.61: C9.2 109.54,96.54 108.02,95.02 IC4-MAX3232.4
N$32
  Bottom 0.406: 111.77,93.76 C9.1
  Bottom 0.61: IC4-MAX3232.5 111.77,93.76
N$33
  Bottom 0.254: 103.47,97.58 103.48,97.57 IC4-MAX3232.2
  Bottom 0.406: C11.2
  Bottom 0.61: 103.47,97.58 102.53,97.58 101.05,99.06 C11.2
N$34
  Bottom 0.406: IC4-MAX3232.6
  Bottom 0.61: C10.2 110.04,90.96 108.52,92.48 IC4-MAX3232.6
N$35
  Bottom 0.406: P_R6.2 P_L8.A
N$36
  Bottom 0.406: IC2-SLAVE.49 97.58,46.8 98.17,46.21 P_R7.1
N$37
  Bottom 0.406: P_R7.2 P_L6.A
N$38
  Bottom 0.406: IC2-SLAVE.48 103.16,54.32 103.67,53.81 P_R8.1
N$39
  Bottom 0.406: P_R8.2 108.41,53.81 108.41,50 P_L5.A
N$44  (via drill 0.6 pad 1.68)
  Bottom 0.61: IC8.5 29.06,90.75 v26.47,90.75
  Bottom 1.016: 6.71,91.17 X8-MAGNETOTORQ.7
  Bottom 1.524: v26.47,90.75 26.47,87.56 23.24,84.33 6.19,84.33 5.46,85.06 5.46,89.92 6.71,91.17
N$50  (via drill 0.6 pad 1.68)
  Top 1.016: 6.45,93.91 X8-MAGNETOTORQ.8
  Top 1.524: 6.45,93.91 5.71,94.64 5.71,98.84 7.71,100.84 21.97,100.84 25.96,96.85 v25.96,93.78
  Bottom 0.61: v25.96,93.78 25.97,93.79 25.99,93.77 IC8.7
N$51
  Bottom 0.406: IC8.1 36.77,95.24
  Bottom 0.61: IC8.8 IC8.1 | IC5.5 44.13,91.1 45.04,92.01 45.04,95.47 43.97,96.53 39.35,96.53 38.05,95.24 36.77,95.24
N$52
  Bottom 0.406: IC9.3 36.87,103.47
  Bottom 0.61: IC6.7 40.79,104.96 39.3,103.47 38.61,103.47 | 36.87,103.47 38.61,103.47 | IC9.4 38.61,102.04 38.61,103.47
N$56  (via drill 0.6 pad 1.68)
  Bottom 0.61: v25.96,102.04 IC9.5
  Bottom 1.016: X8-MAGNETOTORQ.1 20.25,87.05
  Bottom 1.524: 23.41,99.38 23.41,90.21 20.25,87.05 | 23.41,99.38 23.41,99.51 | 23.41,99.38 23.43,99.38 23.43,99.51 v25.96,102.04
N$57  (via drill 0.6 pad 1.68)
  Bottom 0.61: IC9.7 29.13,105.07 v25.96,105.07
  Bottom 1.016: X8-MAGNETOTORQ.2 17.96,89.8
  Bottom 1.524: v25.96,105.07 24.75,105.07 20.65,100.97 20.65,92.49 17.96,89.8
N$61
  Bottom 0.406: IC9.1 36.82,106.57
  Bottom 0.61: IC9.8 IC9.1 | IC6.5 44.34,102.42 45.04,103.11 45.04,106.52 44.38,107.18 39.98,107.18 39.37,106.57 36.82,106.57
N$62
  Bottom 0.406: IC10.3 73.58,103.72 | 79.27,105.09 IC7.7
  Bottom 0.61: 79.27,105.09 76.96,105.09 75.58,103.71 | IC10.3 75.58,103.71 | IC10.4 75.58,102.18 75.58,103.71
N$66  (via drill 0.6 pad 1.68)
  Bottom 0.61: IC10.5 v62.56,102.18
  Bottom 1.016: X8-MAGNETOTORQ.4 15.3,95.28
  Bottom 1.524: 15.3,95.28 17.48,97.46 17.48,102.87 23.83,109.22 57.09,109.22 57.85,108.46 57.85,105.36 61.03,102.18 v62.56,102.18
N$67  (via drill 0.6 pad 1.68)
  Bottom 0.61: IC10.7 65.94,105.22 v62.25,105.22
  Bottom 1.016: X8-MAGNETOTORQ.5 13.16,98.03
  Bottom 1.524: 13.16,98.03 14.3,99.17 14.3,104.01 23.32,113.03 57.34,113.03 60.71,109.66 60.71,106.76 v62.25,105.22
OC3A_0  (via drill 0.6)
  Top 0.406: IC1-MASTER.5 44.18,54.51 35.31,54.51 v33.45,56.36
  Bottom 0.406: IC5.2 49.41,93.61 50.6,93.61 51.49,94.5 R5.2 | v33.45,56.36 33.45,64.52 37.09,68.15 40.97,68.15 40.97,68.2 54.56,81.79 54.56,86.65 53.32,87.9 47.23,87.9 46.31,88.82 46.31,92.55
  Bottom 0.61: 46.31,92.55 47.41,93.64 IC5.2
OC3B_0  (via drill 0.6)
  Top 0.406: IC1-MASTER.6 44.16,55.35 38.03,55.35 v36.86,56.52
  Bottom 0.406: 46.18,103.9 46.18,100.19 47.55,98.82 55.76,98.82 56.87,97.7 56.87,81 42.06,66.19 38.33,66.19 36.86,64.72 v36.86,56.52 | IC6.2 48.94,104.96 48.92,104.97 | IC6.2 | IC6.2 49.46,104.94
  Bottom 0.61: 48.92,104.97 47.25,104.97 46.18,103.9 | R10.2 51.72,105.91 50.75,104.94 49.46,104.94
OC3C_0  (via drill 0.6)
  Top 0.406: IC1-MASTER.7 41.94,56.11 v39.85,58.19
  Bottom 0.406: IC7.2 86.25,105.12 | 82.91,104.1 82.91,98.46 81.21,96.76 63.88,96.76 59.44,92.32 59.44,80.24 43.11,63.91 41.35,63.91 39.85,62.41 v39.85,58.19
  Bottom 0.61: 86.25,105.12 87.81,105.12 89.25,106.56 R12.2 | IC7.2 83.91,105.1 82.91,104.1
PBEACON  (via drill 0.6 pad 1.68)
  Top 1.016: 36.07,6.1 36.07,9.07 | X5-BEACON.13 X5-BEACON.14 36.07,9.07 | 36.07,9.07 X5-BEACON.15
  Top 1.524: 36.07,6.1 34.54,4.57 31.5,4.57 29.94,6.13 v29.94,16.67 32.77,16.67 C12.1
  Power 1.016: 17.35,33.45 11.61,33.45 | 11.61,33.45 X7-POWER.2 | 11.61,33.45 X7-POWER.1
  Power 1.524: v29.94,16.67 27.05,19.56 24.64,19.56 19.05,25.15 19.05,31.75 17.35,33.45
  other vias: 17.27,33.53
  pour Power (isolate 0.305): 13.59,34.67 29.21,34.67 29.21,26.67 73.03,26.67 73.03,15.11 25.02,15.11 13.59,26.42
PC3  (via drill 0.6)
  Top 0.305: 28.57,57.72 28.58,57.72 IC1-MASTER.40
  Top 0.406: IC1-MASTER.40 28.6,57.71 | v35.33,57.3 34.27,57.3 33.84,57.72 28.57,57.72
  Bottom 0.406: 47.32,90.36 47.32,89.19 47.7,88.81 53.9,88.81 55.65,87.06 55.65,81.18 41.58,67.11 37.62,67.11 35.33,64.82 v35.33,57.3 | R9.2 51.42,90.36 50.7,91.07 49.41,91.07 IC5.4
  Bottom 0.61: IC5.4 48.07,91.1 47.32,90.36
PC4  (via drill 0.6)
  Top 0.406: IC1-MASTER.39 37.72,58.52 v38.38,57.86
  Bottom 0.406: 47.17,101.66 47.17,100.83 48.03,99.96 56.24,99.96 58.22,97.98 58.22,80.67 42.7,65.15 40.26,65.15 38.38,63.27 v38.38,57.86 | IC6.4 49.46,102.4
  Bottom 0.61: IC6.4 47.93,102.42 47.17,101.66 | R11.2 51.43,101.8 50.83,102.4 49.46,102.4
PC5  (via drill 0.6)
  Top 0.406: IC1-MASTER.38 28.6,59.33 v40.95,59.33
  Bottom 0.406: IC7.4 86.3,102.63 | 84.57,102.56 83.72,101.71 83.72,97.68 81.69,95.64 64.77,95.64 60.63,91.5 60.63,79.93 43.41,62.71 42.27,62.71 40.95,61.39 | 40.95,61.39 40.92,61.37 | v40.95,59.33 40.95,61.39
  Bottom 0.61: R13.2 89.09,101.7 88.17,102.63 86.3,102.63 | 84.57,102.56 IC7.4
PCHARGE
  Power 1.016: 6.3,34.31 X7-POWER.9 | 129.03,36.07 125.81,36.07 | 125.81,36.07 X4-PREFLET.13 | 125.81,36.07 X4-PREFLET.15 | 125.81,36.07 X4-PREFLET.14
  Power 1.524: 6.3,34.31 5.29,33.29 5.29,23.92 8.13,21.08 14.12,21.08 19.81,15.39 19.81,8.64 23.37,5.08 111.76,5.08 116.84,10.16 116.84,14.22 121.41,18.8 126.49,18.8 129.92,22.22 129.92,35.18 129.03,36.07
  pour Power (isolate 0.305): 132.54,41.15 132.54,15.11 120.02,15.11 120.02,2.54 15.11,2.54 15.11,15.11 2.54,15.11 2.54,39.75 6.94,39.75 6.94,22.48 15.37,22.48 24.13,13.84 31.05,13.84 31.05,7.14 54.04,7.14 54.04,13.84 81.03,13.84 81.03,7.14 104.14,7.14 104.14,13.84 109.44,13.84 118.24,21.97 127.86,21.97 127.86,41.15
PCONTROL/TORQ  (via drill 0.6 pad 1.68)
  Power 1.016: X7-POWER.8 11.61,52.32 v17.27,52.32
  Power 1.524: v40.24,99.61 v32.19,99.61 v32.19,87.73 | v32.19,87.73 40.17,87.73 | v32.19,87.73 30.41,85.95 30.41,53.39 29.34,52.32 v17.27,52.32
  Bottom 0.61: IC6.6 41.2,103.69 40.24,102.73 v40.24,99.61 | IC5.6 41.03,92.37 40.19,91.53 v40.19,87.74 | IC9.6 31.25,103.56 32.19,102.63 v32.19,99.61 | IC7.6 77.66,103.83 77.04,103.21 v77.04,99.61 69.81,99.61 68.96,100.45 68.96,102.76 68.01,103.71 IC10.6 | IC8.6 31.44,92.25 32.19,91.5 v32.19,87.73
  Bottom 1.524: C3.1 v40.19,87.74
  other vias: 37.44,99.61 34.65,99.61 34.72,87.73 37.52,87.73 74.5,99.61
  pour Power (isolate 0.305): 13.59,53.09 28.96,53.09 28.96,102.87 33.15,107.7 85.47,107.7 85.47,89.54 46.99,89.54 46.99,49.28 13.59,49.28
PD
  Top 0.406: 44.21,63.3 IC1-MASTER.16 48.73,63.32 66.32,80.91 66.32,107.56 63.92,109.96 36.5,109.96 30.8,115.66 30.8,116.84 | 30.8,116.84 30.8,127.29 31.92,128.41 34.7,128.41 37.05,126.06 X1-ADC.10 | TP_PD.TP 30.99,117.03 30.8,116.84
PDOWNLINK  (via drill 0.6 pad 1.68)
  Top 1.016: 88.39,9.07 X5-DOWNLINK.13 | 88.39,6.35 88.39,9.07 | 88.39,9.07 X5-DOWNLINK.14 X5-DOWNLINK.15
  Top 1.524: C5.1 v105.16,22.92 v105.16,17.83 105.16,6.6 103.63,5.08 89.66,5.08 88.39,6.35
  Power 1.016: 11.61,39.12 X7-POWER.4 | 11.61,39.12 v17.27,39.12 | X7-POWER.3 11.61,39.12
  Power 1.524: v17.27,39.12 92.46,39.12 105.16,26.42 v105.16,22.92
  pour Power (isolate 0.305): 13.59,40.64 120.97,40.64 120.97,26.04 108.84,15.11 74.3,15.11 74.3,28.07 30.48,27.94 30.48,35.94 13.59,35.94
PE0_0  (via drill 0.6)
  Top 0.406: X4-PREFLET.1 116.66,52.14 TP_PE0_0.TP 111.25,46.74 80.04,46.74 79.43,47.35 v79.43,52.76
  Bottom 0.406: IC2-SLAVE.2 81.79,55.12 v79.43,52.76
PE0_1  (via drill 0.6)
  Top 0.406: X4-PREFLET.8 116.16,32.94 TP_PE0_1.TP 63.44,36.83 v48.61,51.66 48.15,52.12 IC1-MASTER.2 | TP_GPSOUT.TP 90.96,93.76 v92.2,93.76
  Bottom 0.406: IC4-MAX3232.12 v92.2,93.76 67.09,93.76 61.98,88.65 61.98,79.76 53.59,71.37 53.59,52.83 52.42,51.66 v48.61,51.66
PE1_0  (via drill 0.6)
  Top 0.406: X4-PREFLET.2 116.45,49.4 TP_PE1_0.TP 112.52,45.47 79.71,45.47 77.98,47.19 77.98,53.57 v79,54.59
  Bottom 0.406: IC2-SLAVE.3 80.33,55.92 v79,54.59
PE1_1
  Top 0.406: IC1-MASTER.3 49.22,52.92 63.78,38.35 TP_PE1_1.TP 116.21,35.68 X4-PREFLET.7
PFCHECK  (via drill 0.6)
  Top 0.406: IC1-MASTER.31 31.19,69.02 30.14,70.07 v15.27,70.07 15.27,70.1 TP_PFCHECK.TP
  Bottom 0.61: v15.27,70.07 11.39,70.07 4.57,63.25 4.57,39.8 | X4-PREFLET.10 128.25,48.03 130.05,46.23 130.05,23.37 125.73,19.05 123.19,19.05 119.38,15.24 119.38,11.43 112.01,4.06 24.89,4.06 4.57,24.38 4.57,39.8 | 4.57,39.8 X7-POWER.11
PGPS  (via drill 0.6 pad 1.68)
  Top 1.016: v17.27,54.86 C4.1
  Power 1.016: X7-POWER.15 9.07,54.28 | X2-GPS.8 93.91,125.41 92.54,124.04 X2-GPS.3 92.54,116.84
  Power 1.524: 9.07,54.28 9.65,54.86 v17.27,54.86 18.29,54.86 20.7,57.28 20.7,105.23 30.79,115.32 90.93,115.32 v92.46,116.84 92.54,116.84
  pour Power (isolate 0.305): 15.11,54.36 15.11,107.44 28.45,119.95 106.55,119.95 115.44,111.06 115.44,108.97 32.51,108.97 27.69,103.51 27.69,54.36
PMAG  (via drill 0.6 pad 1.68)
  Top 1.524: C8.1 125.1,111.89 v129.18,107.81
  Power 1.016: 128.38,88.43 X3-MAGNETOMETER.9 | 6.28,48.03 X7-POWER.14
  Power 1.524: 128.38,88.43 129.18,89.22 v129.18,107.81 108.33,128.65 23.07,128.65 4.52,110.11 4.52,49.78 6.28,48.03
  other vias: 125.11,111.87 127.14,109.84 4.57,70.61
  pour Power (isolate 0.61): 2.54,45.47 2.54,120.02 15.11,120.02 15.11,132.54 120.02,132.54 120.02,120.02 132.54,120.02 132.54,78.04 127.86,78.04 127.86,99.95 121.16,99.95 121.16,107.32 107.32,121.16 99.95,121.16 99.95,127.86 85.09,127.86 85.09,121.22 53.91,121.22 53.91,127.86 31.05,127.86 31.05,121.22 27.81,121.22 13.84,107.95 13.84,99.95 7.14,99.95 7.14,85.09 13.84,85.09 13.84,63.12 6.94,63.12 6.94,45.47
RANGE
  Top 0.406: IC1-MASTER.17 42.39,69.01 43.14,69.76 53.38,69.76 65.12,81.5 65.12,106.67 63.2,108.59 35.66,108.59 29.54,114.71 29.54,116.84 | 29.54,116.84 29.54,127.71 31.5,129.67 36.38,129.67 39.8,126.25 X1-ADC.11 | TP_RANGE.TP 29.29,117.09 29.54,116.84
RST0  (via drill 0.6 pad 0.41)
  Top 0.406: v78.44,65.68 75.31,62.56 75.31,46.1 78.52,42.9 115.06,42.9 TP_RST0.TP X4-PREFLET.4
  Bottom 0.406: IC2-SLAVE.20 87.98,72.07 83.9,76.15 R113.2 C113.2 78.44,72.95 v78.44,65.68
RST1  (via drill 0.6, 0.6 pad 0.41)
  Top 0.406: v41.99,57.78 41.99,61.21 39.96,63.25 40.01,63.25 39.96,63.29 39.96,65.09 IC1-MASTER.20 39.99,71 43.19,74.2 C6.1 R53.1 | TP_RST1.TP X4-PREFLET.5 64.78,41.17 v52.1,53.85
  Bottom 0.406: v52.1,53.85 45.92,53.85 v41.99,57.78
RX1_0  (via drill 0.6)
  Top 0.406: IC1-MASTER.27 34.39,70.54 v33.99,70.94 | v63.75,85.47 53.43,85.47 v52.67,84.71 | TP_MAGT.TP 87.91,89.95 v89.15,89.95
  Bottom 0.406: v33.99,70.94 33.99,71.02 34.6,71.63 42.62,71.63 52.67,81.67 v52.67,84.71 | IC4-MAX3232.9 v89.15,89.95 68.23,89.95 v63.75,85.47
SCK1  (via drill 0.6, 0.6 pad 0.41)
  Top 0.406: IC1-MASTER.11 44.2,59.33 | IC1-MASTER.11 44.2,59.31 | v70.03,79.59 70.09,79.65 70.09,109.5 65.8,113.79 45.93,113.79 42.77,116.94 42.67,117.05 | IC1-MASTER.11 55.87,59.32 v56.39,58.8 57.78,57.4 v71.71,57.4 | v76.56,60.73 76.56,46.91 79.28,44.2 113.79,44.2 TP_SCK_S.TP 116.25,46.66 X4-PREFLET.3 | X1-ADC.4 41.17,118.55 42.67,117.05 | TP_SCK1.TP 93.91,17.71 X5-DOWNLINK.4 | 42.67,117.05 TP__SCK1.TP
  Bottom 0.406: v70.03,79.59 63.44,79.59 54.86,71.02 54.86,60.32 v56.39,58.8 57.78,57.4 66.55,57.4 67.56,56.39 67.56,41.59 93.91,15.24 X5-DOWNLINK.4 | IC2-SLAVE.11 78.15,62.32 v76.56,60.73 73.23,57.4 v71.71,57.4
SCL
  Top 0.406: IC1-MASTER.25 35.99,73.13 33.94,75.18 TP_SCL.TP
  Top 0.61: TP_SCL.TP 14.09,75.18 4.37,65.47 4.37,44.54 6.37,42.54 X7-POWER.12
SDA
  Top 0.406: IC1-MASTER.26 35.18,71.88 34.42,72.64 TP_SDA.TP
  Top 0.61: TP_SDA.TP 13.97,72.64 6.1,64.77 6.1,46.18 6.99,45.28 X7-POWER.13
SS_CC  (via drill 0.6 pad 0.41)
  Top 0.406: IC1-MASTER.14 50.67,61.72 52.45,63.5 57.65,63.5 60.75,60.4 73.4,60.4 74.31,59.49 74.31,53.67 v72.53,51.89 | X5-DOWNLINK.5 91.17,17.78 | 91.17,17.78 v91.17,24.35 | 91.17,17.78 TP_SS_CC.TP
  Bottom 0.406: v72.53,51.89 72.53,42.99 v91.17,24.35
SS_MUC  (via drill 0.6)
  Top 0.406: IC1-MASTER.10 52.61,58.52 v55.37,55.75 v72.64,55.75 | X4-PREFLET.6 116.26,38.42 TP_SS_MUC.TP 64.26,39.88 v55.37,48.77
  Bottom 0.406: IC2-SLAVE.10 78.86,61.52 73.09,55.75 v72.64,55.75 | v55.37,55.75 v55.37,48.77
SS_SS
  Top 0.406: IC1-MASTER.15 44.22,62.48 49.43,62.48 62.4,75.45 68.44,75.45 71.35,78.36 71.35,110.2 66.41,115.14 48.07,115.14 46.3,116.91 46.23,116.98 | X1-ADC.5 43.91,119.3 46.23,116.98 | 46.23,116.98 TP_SS_SS.TP
TX1_0  (via drill 0.6, 0.6 pad 0.41)
  Top 0.406: IC1-MASTER.28 33.59,69.03 v32.82,69.8 | v63.63,87.19 52.7,87.19 v51.44,85.92 | TP_MAGR.TP 90.96,91.22 v92.2,91.22
  Bottom 0.406: IC4-MAX3232.10 v92.2,91.22 67.66,91.22 v63.63,87.19 | v32.82,69.8 32.82,71.91 33.96,73.05 42.57,73.05 51.44,81.91 v51.44,85.92
VAPC  (via drill 0.6 pad 0.41)
  Top 0.61: X5-DOWNLINK.8 82.94,17.78 | 82.94,17.78 v82.94,35.06 | 82.94,17.78 TP_VAPC.TP 84.84,17.78 85.68,16.93 X5-DOWNLINK.7
  Bottom 0.406: IC2-SLAVE.9 83.77,60.73 79.46,60.73 74.31,55.58 74.31,43.69 v82.94,35.06
(copper drawn outside any net)
  shapes: Top circle x1

## Text on the board
Top: Top | IITB Pratham
Bottom: Bottom | Hus-SatOBC | Flight_18_2_12
tPlace: Top | IITB Pratham
bPlace: Bottom | Hus-SatOBC | Flight_18_2_12
tNames: PGPS | GND | +3v3 | PMAG | PGPS | PCONTROL | GND | +3V3 | PDOWNLINK | PBEACON | GND
bNames: IC3-EEPROM
bValues: ZXMHC3A01T8 | ZXMHC3A01T8 | ZXMHC3A01T8 | 24FC1025